# Allegro board RK3568_Template_DDR3P416DD6_44X41_1066MHz_V10_20210129GXL.brd
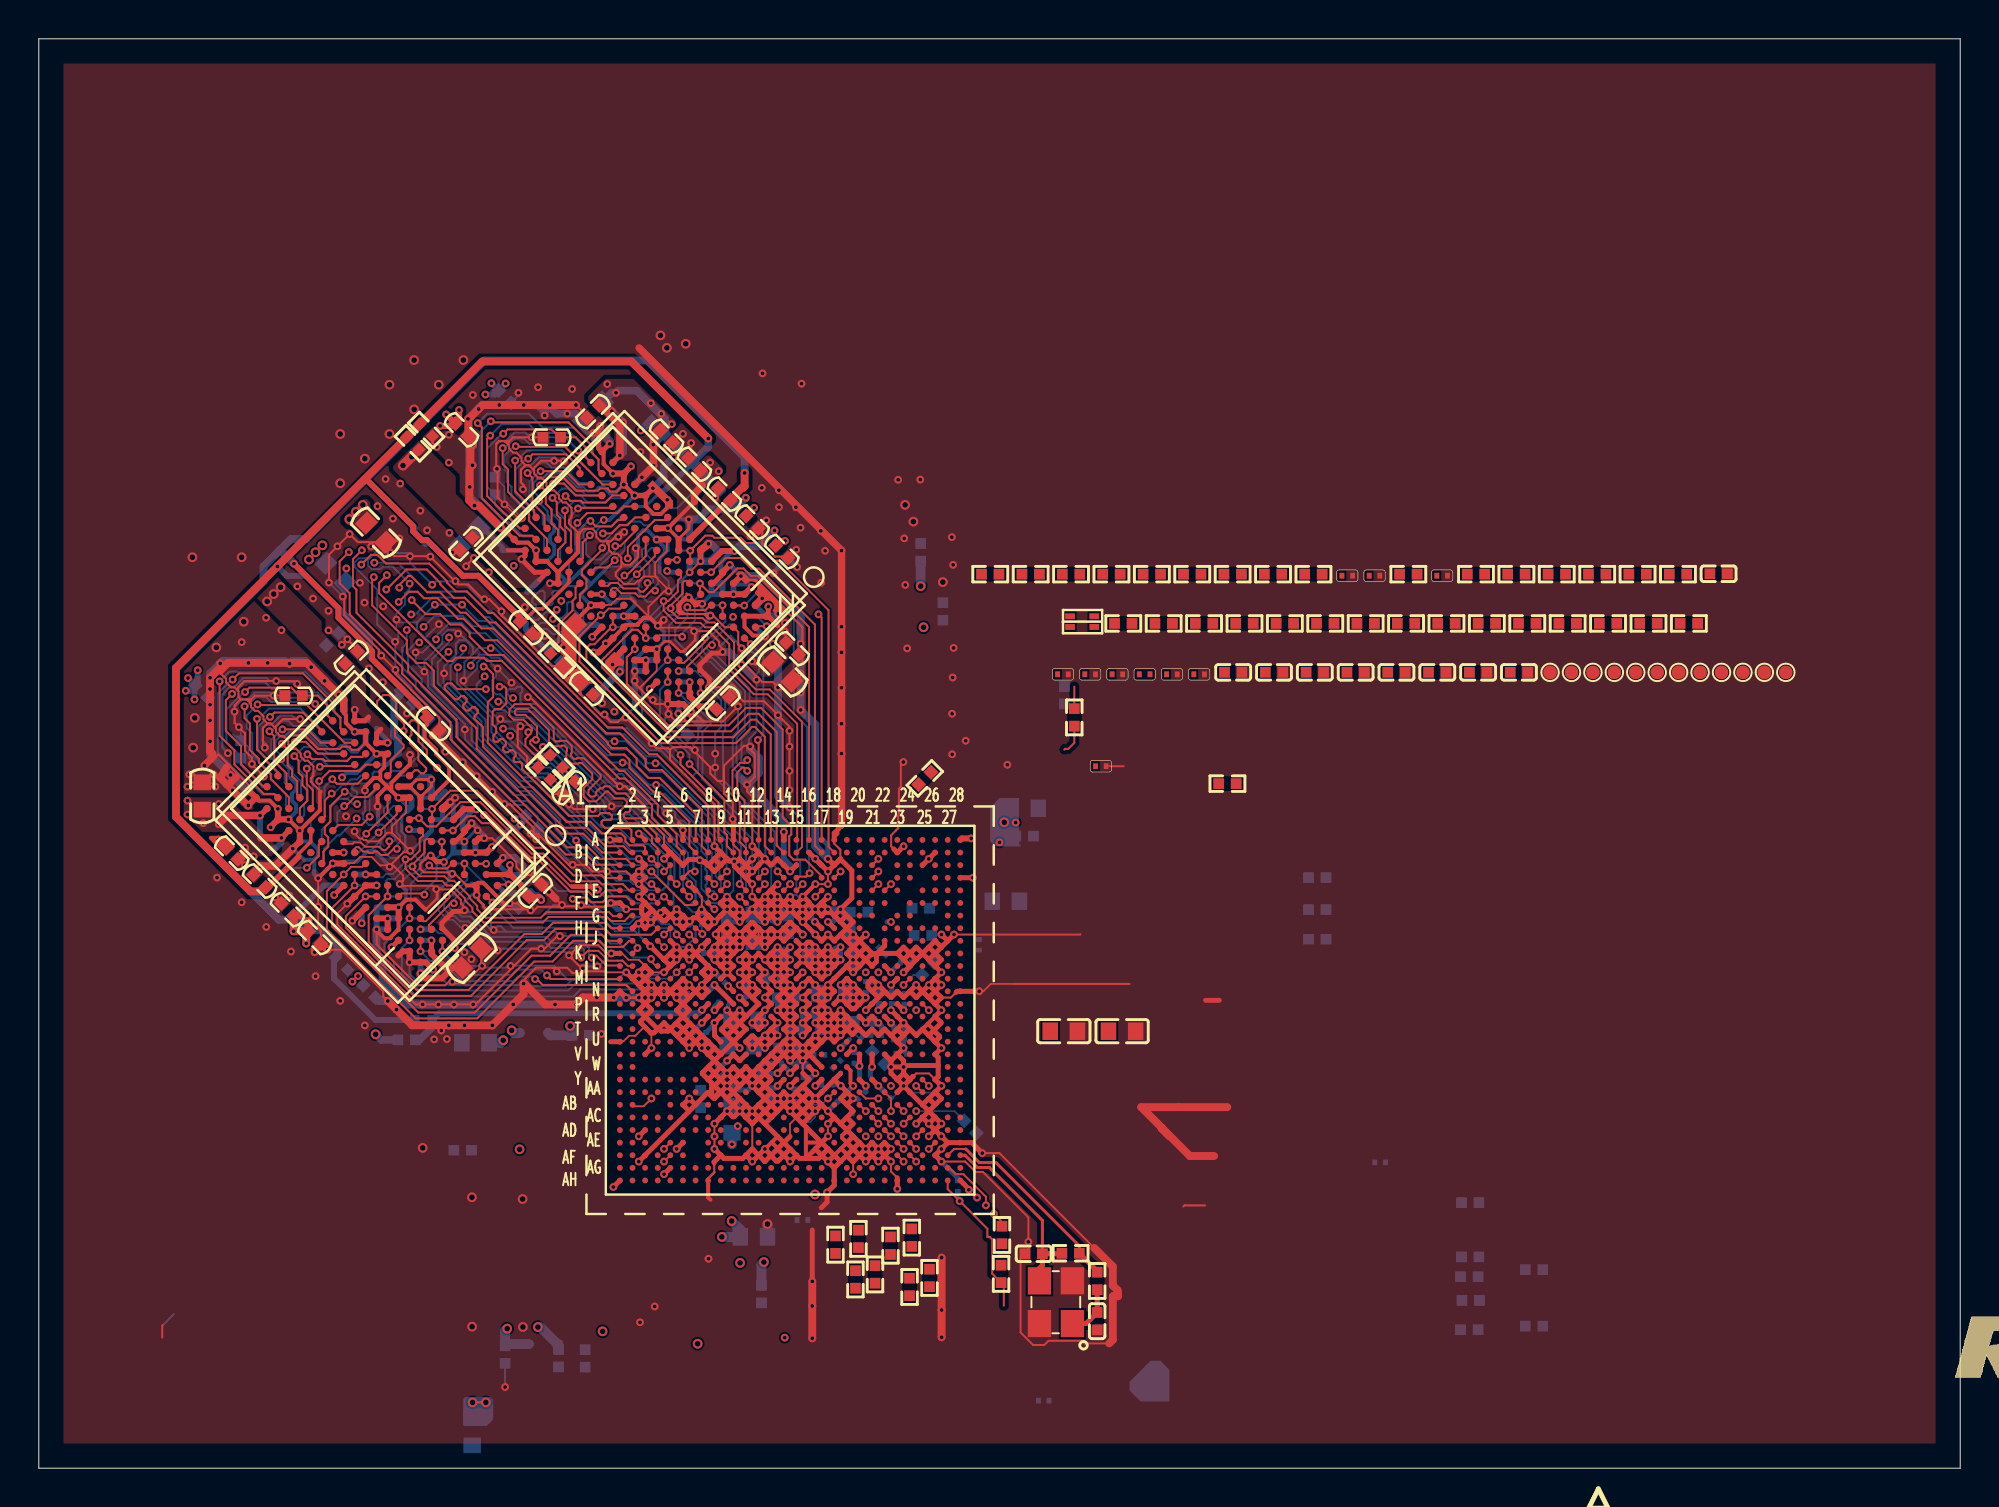
[diagram p0: board, top side]
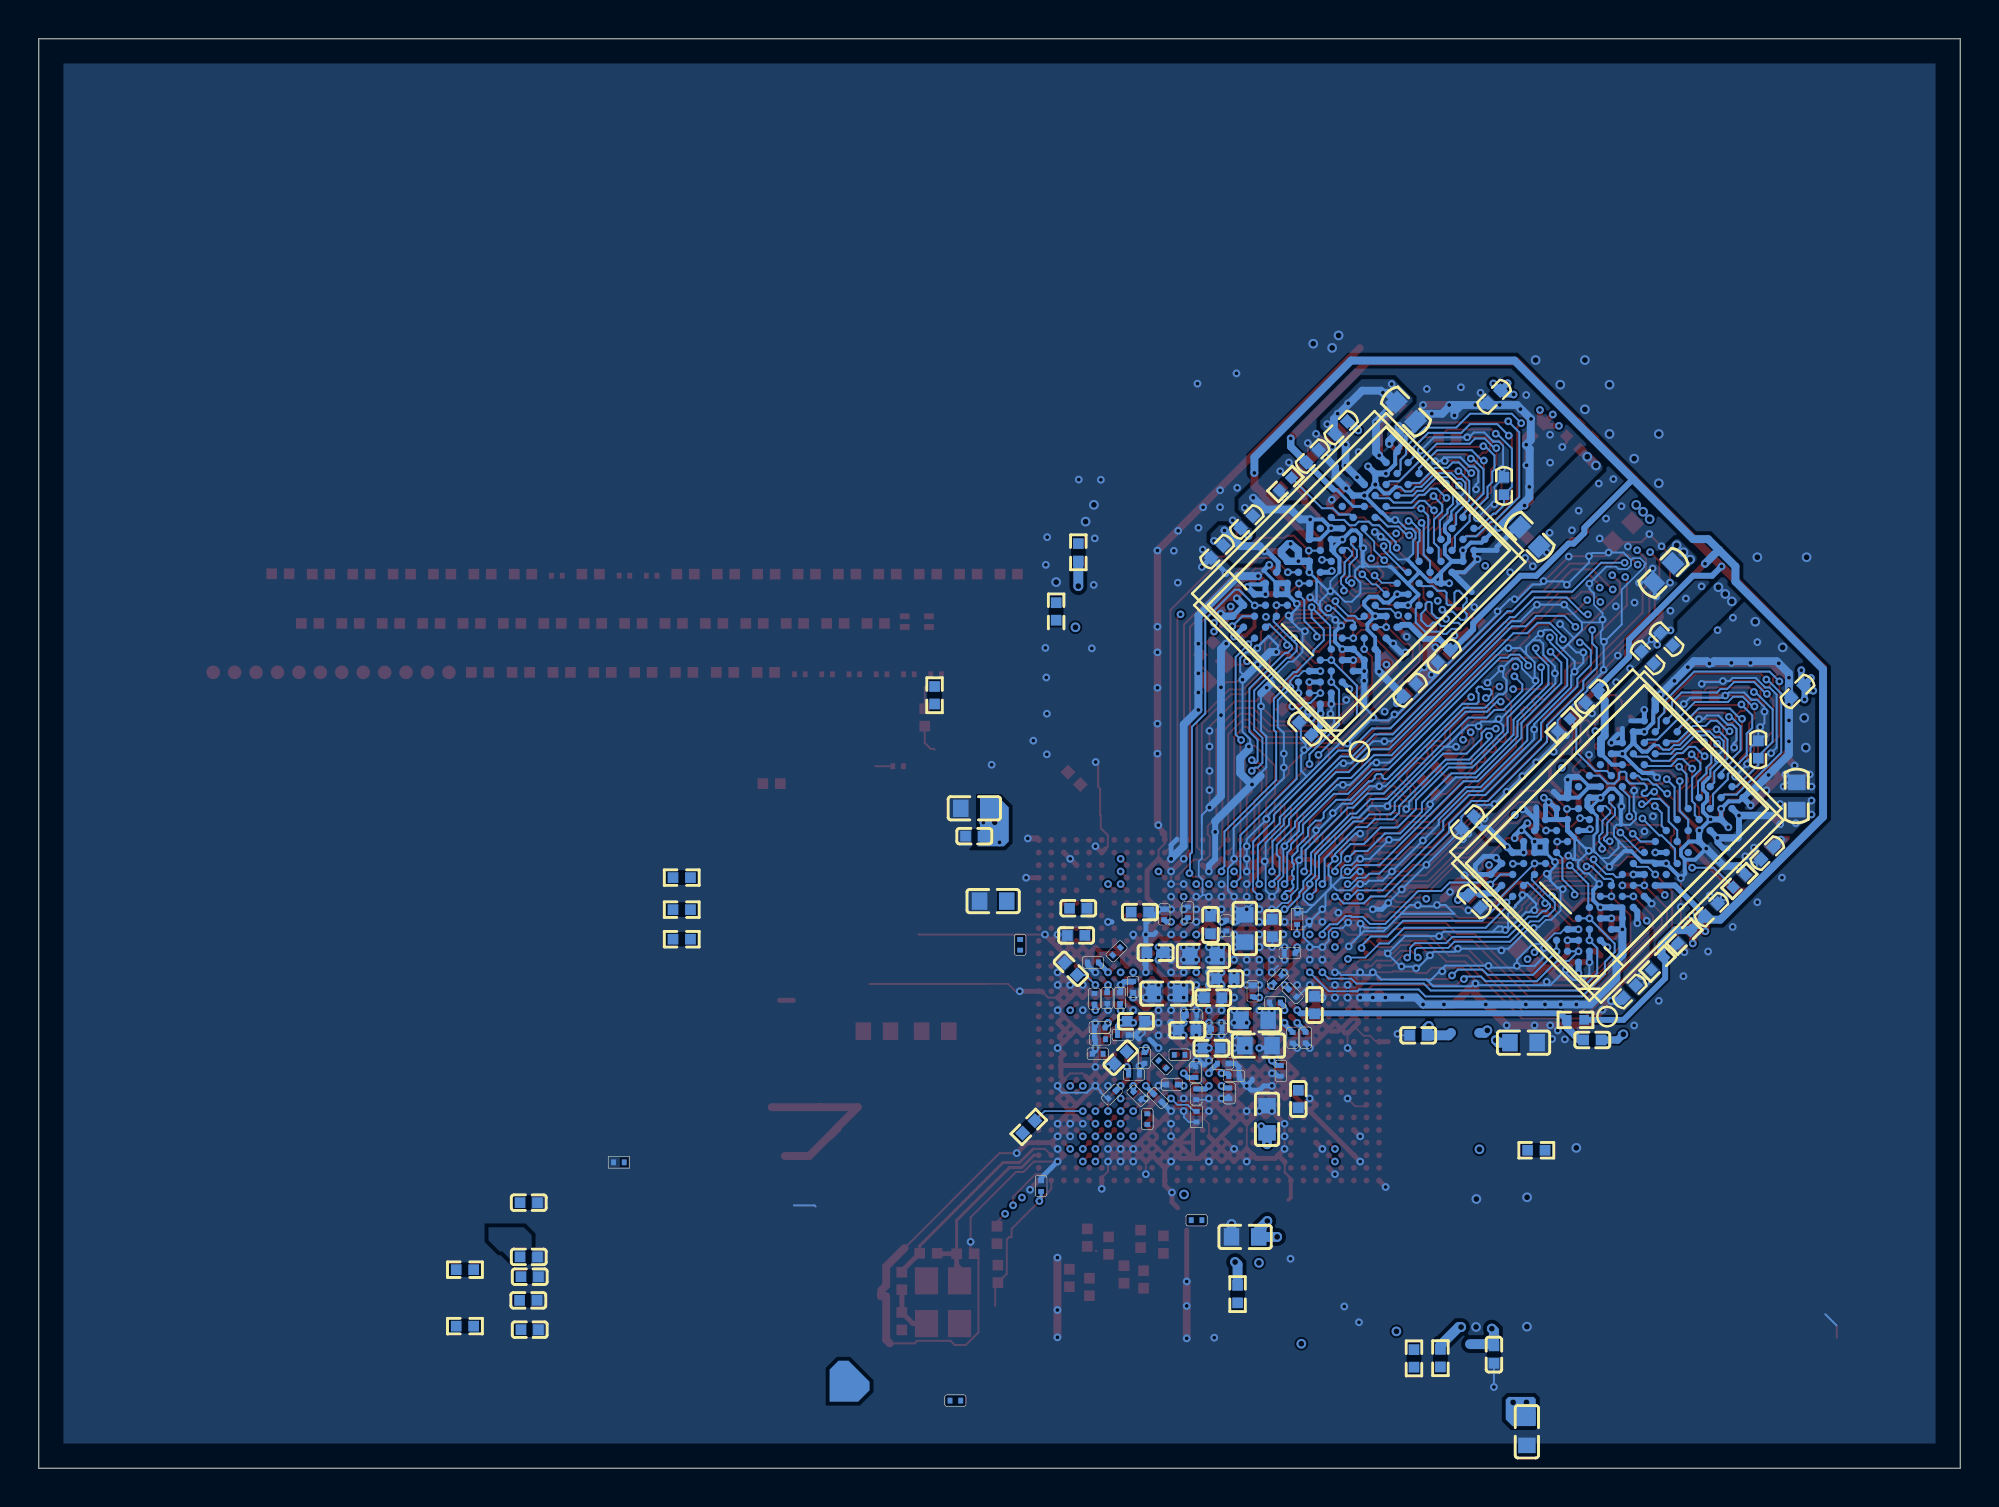
[diagram p1: board, bottom side, seen from below]

Outline 99.06 x 73.66 mm; copper layers: TOP, L2-GND1, L3-POWER, L4-S1, L5-GND2, BOTTOM. Coordinates in mm from the lower left corner of the outline.
Outline path: 0,73.66 99.06,73.66 99.06,0 0,0 0,73.66

## Design rules (mm)
net group DDR3_CLK: nets DDR3_CLKN DDR3_CLKP
net group EDP_TXD1N: nets EDP_TX_D1N EDP_TXD1N
net group EDP_TXD2N: nets EDP_TX_D2N EDP_TXD2N
net group EDP_TXD3P: nets EDP_TX_D3P EDP_TXD3P
net group EMMC_CLKOUT/FLASH_DQS: nets EMMC_CLKOUT/FLASH_DQS EMMC_CLKOUT/FLASH_DQS_SOC
net group FSPI_CLK/FLASH_ALE: nets FSPI_CLK/FLASH_ALE FSPI_CLK/FLASH_ALE_SOC
net group GMAC1_TXD2_M1: nets GMAC1_TXD2_M1 GMAC1_TXD2_M1_SOC
net group HDMI_TX0N: nets HDMI_TX0N HDMI_TX0N_PORT
net group HDMI_TX0P: nets HDMI_TX0P HDMI_TX0P_PORT
net group HDMI_TX1N: nets HDMI_TX1N HDMI_TX1N_PORT
net group HDMI_TX1P: nets HDMI_TX1P HDMI_TX1P_PORT
net group HDMI_TX2N: nets HDMI_TX2N HDMI_TX2N_PORT
net group HDMI_TX2P: nets HDMI_TX2P HDMI_TX2P_PORT
net group HDMI_TXCLKN: nets HDMI_TXCLKN HDMI_TXCLKN_PORT
net group HDMI_TXCLKP: nets HDMI_TXCLKP HDMI_TXCLKP_PORT
net group PCIE30_REFCLK_IN: nets PCIE30_REFCLKN_IN PCIE30_REFCLKP_IN
net group PCIE30_RX0: nets PCIE30_RX0N PCIE30_RX0P
net group PCIE30_RX1: nets PCIE30_RX1N PCIE30_RX1P
net group PCIE30_TX0: nets PCIE30_TX0N PCIE30_TX0P
net group PCIE30_TX1: nets PCIE30_TX1N PCIE30_TX1P
net group SATA1_RX: nets SATA1_RXN SATA1_RXP
net group SATA1_TX: nets SATA1_TXN SATA1_TXP
net group SATA2RX: nets SATA0_RXN SATA0_RXP
net group SATA2TX: nets SATA0_TXN SATA0_TXP
net group SDMMC0_D2/ARMJTAG_TCK: nets N17520091 SDMMC0_D2/ARMJTAG_TCK
net group SDMMC0_D3/ARMJTAG_TMS: nets N17520047 SDMMC0_D3/ARMJTAG_TMS
net group USB3_HOST1D: nets USB3_HOST1_DM USB3_HOST1_DP
net group USB3_OTG0D: nets USB3_OTG0_DM USB3_OTG0_DP

## Placement (name value [footprint] x y rotation side)
C1000  100nF  [C0402]  41.48 26.56 0 bottom
C1001  4.7uF  [C0402]  50.83 32.57 0 bottom
C1002  22uF  [C0603]  39.02 26.4 180 bottom
C1003  22uF  [C0603]  49.86 29.22 0 bottom
C1004  22uF  [C0603]  50.83 34.01 0 bottom
C1005  100nF  [C0201]  39.63 23.33 0 bottom
C1006  4.7uF  [C0402]  39.85 22.57 0 bottom
C1007  1uF  [C0402]  38.51 24.25 180 bottom
C1008  1uF  [C0402]  37.88 25.23 0 bottom
C1009  22uF  [C0603]  36.38 23.09 180 bottom
C1010  22uF  [C0603]  22.34 1.88 270 bottom
C1011  10uF  [C0603]  22.51 21.93 180 bottom
C1012  100nF  [C0201]  38.33 22.64 0 bottom
C1013  4.7uF  [C0402]  38.6 21.65 0 bottom
C1014  22uF  [C0603]  36.18 21.78 180 bottom
C1015  22uF  [C0603]  36.87 11.92 0 bottom
C1016  10uF  [C0603]  35.74 17.98 90 bottom
C1017  100nF  [C0201]  42.64 24.8 90 bottom
C1018  22uF  [C0603]  40.9 24.46 180 bottom
C1019  22uF  [C0603]  55.85 22.52 0 top
C1020  10uF  [C0603]  52.85 22.52 0 top
C1100  100nF  [C0201]  37.84 27.96 90 bottom
C1101  100nF  [C0201]  34.57 26.55 180 bottom
C1102  4.7uF  [C0402]  35.46 27.84 90 bottom
C1103  4.7uF  [C0402]  38.65 28 90 bottom
C1104  10uF  [C0603]  36.88 27.81 90 bottom
C1200  100nF  [C0201]  47.38 14.54 90 bottom
C1201  18pF  [C0402]  54.57 7.58 270 top
C1202  18pF  [C0402]  51.29 11.05 180 top
C1203  100nF  [C0201]  42.42 19.2 225 bottom
C1204  1uF  [C0402]  73.75 9.87 180 bottom
C1205  100nF  [C0201]  42.6 20.28 180 bottom
C1206  1uF  [C0402]  73.75 7.14 180 bottom
C1207  100nF  [C0201]  43.73 19.26 315 bottom
C1208  1uF  [C0402]  24.04 5.85 270 bottom
C1209  100nF  [C0201]  36.47 24.57 90 bottom
C1210  100nF  [C0201]  41.37 19.08 225 bottom
C1211  1uF  [C0402]  27.94 22.31 0 bottom
C1212  100nF  [C0201]  35.19 25.2 135 bottom
C1213  100nF  [C0201]  42.06 21.14 270 bottom
C1214  1uF  [C0402]  73.82 8.65 180 bottom
C1300  100nF  [C0201]  41.04 28.54 90 bottom
C1301  100nF  [C0201]  44.71 26.07 0 bottom
C1400  100nF  [C0402]  45.85 25.74 45 bottom
C1401  100nF  [C0201]  43.97 24.23 270 bottom
C1402  100nF  [C0201]  44.63 24.19 90 bottom
C1403  100nF  [C0201]  43.32 24.23 90 bottom
C1404  100nF  [C0201]  34.42 24.48 225 bottom
C1405  100nF  [C0201]  35.33 24 0 bottom
C1406  100nF  [C0201]  33.75 22.19 270 bottom
C1407  100nF  [C0201]  44.36 22.71 0 bottom
C1408  100nF  [C0201]  43.18 22.32 180 bottom
C1409  4.7uF  [C0402]  42.5 23.03 180 bottom
C1410  4.7uF  [C0402]  73.8 13.68 180 bottom
C1411  100nF  [C0201]  44.46 21.36 0 bottom
C1412  100nF  [C0201]  44.34 22.1 0 bottom
C1413  4.7uF  [C0402]  43.29 21.15 315 bottom
C1414  4.7uF  [C0402]  73.8 10.89 180 bottom
C1500  100nF  [C0201]  54.76 36.17 0 top
C1501  1nF  [C0402]  45.47 28.86 180 bottom
C1502  1nF  [C0402]  42.29 28.66 180 bottom
C1503  1nF  [C0402]  45.58 27.45 0 bottom
C1504  1nF  [C0402]  34.12 19.03 270 bottom
C1505  1nF  [C0402]  61.58 41.01 0 top
C1506  1nF  [C0402]  70 41.01 0 top
C1507  1nF  [C0402]  72.1 41.01 0 top
C1508  1nF  [C0402]  63.68 41.01 0 top
C1509  100nF  [C0201]  52.8 40.91 0 top
C1510  100nF  [C0201]  54.2 40.91 0 top
C1511  100nF  [C0201]  55.61 40.91 0 top
C1600  100nF  [C0201]  37.68 19.32 270 bottom
C1601  100nF  [C0201]  37.43 20.21 180 bottom
C1602  100nF  [C0201]  34.42 22.18 270 bottom
C1603  1uF  [C0402]  76.31 41.01 0 top
C1700  100nF  [C0201]  40.64 19.77 0 bottom
C1701  100nF  [C0201]  39.42 20.41 90 bottom
C1702  100nF  [C0201]  39.39 19.27 270 bottom
C1703  100nF  [C0201]  38.02 20.85 180 bottom
C1704  100nF  [C0201]  41.91 17.99 270 bottom
C1705  100nF  [C0201]  43.49 26.63 135 bottom
C1706  100nF  [C0201]  48.46 26.97 90 bottom
C1707  100nF  [C0201]  41.13 20.81 45 bottom
C1708  100nF  [C0201]  40.25 21.3 180 bottom
C1709  100nF  [C0201]  51.81 3.48 0 bottom
C1710  100nF  [C0201]  39.37 12.78 0 bottom
C1711  100nF  [C0201]  57.01 40.91 0 top
C1712  100nF  [C0201]  58.42 40.91 0 top
C1713  100nF  [C0201]  59.82 40.91 0 top
C1714  100nF  [C0201]  68.86 45.99 0 top
C1715  1uF  [C0402]  74.21 41.01 0 top
C1716  1uF  [C0402]  67.89 41.01 0 top
C1717  100nF  [C0201]  67.46 45.99 0 top
C1718  100nF  [C0201]  72.35 45.99 0 top
C1719  4.7uF  [C0402]  65.79 41.01 0 top
C1720  4.7uF  [C0402]  86.6 46.09 0 top
C1800  100nF  [C0201]  35.02 20.48 270 bottom
C1900  100nF  [C0201]  39.82 28.65 90 bottom
C3100  1nF  [C0402]  26.44 53.12 180 top
C3101  1nF  [C0402]  10.41 37.04 90 bottom
C3102  1nF  [C0402]  23.52 50.62 90 bottom
C3103  1nF  [C0402]  13.14 39.82 180 top
C3104  100pF  [C0402]  27.34 35.06 225 top
C3105  1nF  [C0402]  11.38 30.26 135 top
C3106  1nF  [C0402]  18.99 39.76 315 bottom
C3107  1nF  [C0402]  25.13 43.32 315 top
C3108  1nF  [C0402]  33.39 52.15 135 bottom
C3109  10uF  [C0603]  22.31 26.29 45 top
C3110  10uF  [C0603]  22.2 48 225 bottom
C3111  100nF  [C0402]  33.8 51.74 135 top
C3112  100nF  [C0402]  38.31 47.23 315 top
C3113  100nF  [C0402]  32.36 53.18 315 top
C3114  100nF  [C0402]  25.4 33.28 315 bottom
C3115  100nF  [C0402]  15.14 42.72 45 bottom
C3116  100nF  [C0402]  24.03 55.22 315 bottom
C3117  100nF  [C0402]  36.78 48.76 315 top
C3118  10uF  [C0603]  8.43 34.64 90 bottom
C3119  10uF  [C0603]  38.34 41.05 315 top
C3120  100nF  [C0402]  17.04 24.56 315 bottom
C3121  100nF  [C0402]  28.37 40.1 135 bottom
C3122  100nF  [C0402]  16.12 41.78 45 bottom
C3123  100nF  [C0402]  33.77 38.1 45 bottom
C3124  100nF  [C0402]  22.02 47.64 225 top
C3125  100nF  [C0402]  31.92 53.62 135 bottom
C3126  100nF  [C0402]  28.57 54.45 225 top
C3127  1nF  [C0402]  12.82 28.78 135 bottom
C3128  1nF  [C0402]  26.61 41.85 315 bottom
C3129  1nF  [C0402]  20.33 38.36 315 top
C3130  1nF  [C0402]  35.34 50.19 135 top
C3131  10uF  [C0603]  15.3 46.13 315 bottom
C3132  10uF  [C0603]  8.43 34.64 90 top
C3133  100nF  [C0402]  35.27 39.41 45 top
C3134  100nF  [C0402]  25.6 29.76 45 top
C3135  100nF  [C0402]  16.12 41.78 45 top
C3136  100nF  [C0402]  9.95 31.69 135 bottom
C3137  100nF  [C0402]  38.85 42.24 315 top
C3138  100nF  [C0402]  25.06 29.21 225 bottom
C3139  100nF  [C0402]  9.95 31.69 135 top
C3140  10uF  [C0603]  28.57 54.45 225 bottom
C3141  10uF  [C0603]  17.38 48.22 315 top
C3142  100nF  [C0402]  38.31 47.23 315 bottom
C3143  100nF  [C0402]  36.78 48.76 315 bottom
C3144  100nF  [C0402]  14.22 27.35 315 top
C3145  100nF  [C0402]  21.79 53.51 315 top
C3146  100nF  [C0402]  12.82 28.79 135 top
C3147  100nF  [C0402]  28.24 40.17 135 top
C3148  100nF  [C0402]  8.39 40.03 315 bottom
C3149  1nF  [C0402]  18.97 22.07 0 bottom
C3150  1nF  [C0402]  33.29 23.87 90 bottom
L1700  NC  [RP2_0405]  53.79 43.63 0 top
NOREF  -  []  108.2 3.43 0 top
R1100  120R  [R0201]  34.19 28.29 90 bottom
R1200  22R  [R0402#2]  54.57 9.65 90 top
R1201  0R  [R0402#2]  49.61 10.01 90 top
R1202  1M  [R0402#2]  53.2 11.08 180 top
R1203  22R  [R0402#2]  49.66 12.02 90 top
R1204  2.2K  [R0402#2]  48.02 17.59 315 bottom
R1205  2.2K  [R0402#2]  37.26 8.97 270 bottom
R1206  2.2K  [R0402#2]  77.09 10.23 180 bottom
R1207  2.2K  [R0402#2]  77.09 7.32 180 bottom
R1300  22R  [R0402#2]  61.28 35.28 0 top
R1301  22R  [R0402#2]  45.68 35.55 45 top
R1302  22R  [R0402#2]  46.61 44.15 90 bottom
R1303  22R  [R0402#2]  65.91 27.26 0 bottom
R1304  22R  [R0402#2]  55.91 43.53 0 top
R1400  200R  [R0201]  69.15 15.76 0 bottom
R1500  22R  [R0402#2]  52.88 39.83 90 bottom
R1501  22R  [R0402#2]  65.91 28.78 0 bottom
R1502  22R  [R0402#2]  65.91 30.43 0 bottom
R1503  22R  [R0402#2]  53.39 38.69 90 top
R1504  22R  [R0402#2]  28.16 5.66 270 bottom
R1505  22R  [R0402#2]  57.99 43.53 0 top
R1506  22R  [R0402#2]  60.08 43.53 0 top
R1507  22R  [R0402#2]  62.16 43.53 0 top
R1508  0R  [R0402#2]  80.34 46.07 0 top
R1509  0R  [R0402#2]  78.26 46.07 0 top
R1510  0R  [R0402#2]  76.18 46.07 0 top
R1511  0R  [R0402#2]  74.1 46.07 0 top
R1512  10K  [R0402#2]  84.51 46.07 0 top
R1600  22R  [R0402#2]  21.85 16.38 180 bottom
R1601  22R  [R0402#2]  64.24 43.53 0 top
R1602  22R  [R0402#2]  66.33 43.53 0 top
R1603  22R  [R0402#2]  68.41 43.53 0 top
R1604  22R  [R0402#2]  70.49 43.53 0 top
R1605  22R  [R0402#2]  72.57 43.53 0 top
R1606  2.2K  [R0402#2]  55.3 46.07 0 top
R1607  2.2K  [R0402#2]  57.38 46.07 0 top
R1608  22R  [R0402#2]  74.66 43.53 0 top
R1609  22R  [R0402#2]  76.74 43.53 0 top
R1610  0R  [R0402#2]  70.61 46.07 0 top
R1611  0R  [R0402#2]  65.72 46.07 0 top
R1700  2.2R  [R0402#2]  45.92 9.8 270 top
R1701  2.2R  [R0402#2]  44.89 9.34 270 top
R1702  2.2R  [R0402#2]  45.01 11.88 270 top
R1703  2.2R  [R0402#2]  43.91 11.47 270 top
R1704  2.2R  [R0402#2]  43.11 9.98 270 top
R1705  2.2R  [R0402#2]  42.1 9.73 270 top
R1706  2.2R  [R0402#2]  42.26 11.82 270 top
R1707  2.2R  [R0402#2]  41.08 11.52 270 top
R1708  1.62K  [R0201]  39.37 18.12 270 bottom
R1800  10K  [R0402#2]  26.8 5.67 270 bottom
R1801  10K  [R0402#2]  82.43 46.07 0 top
R1802  22R  [R0402#2]  78.82 43.53 0 top
R1803  22R  [R0402#2]  80.91 43.53 0 top
R1804  2.2K  [R0402#2]  59.47 46.07 0 top
R1805  2.2K  [R0402#2]  61.55 46.07 0 top
R1900  2.2K  [R0402#2]  45.47 47.2 90 bottom
R1901  2.2K  [R0402#2]  63.63 46.07 0 top
R1902  22R  [R0402#2]  82.99 43.53 0 top
R1903  22R  [R0402#2]  85.07 43.53 0 top
R1904  22R  [R0402#2]  49.05 46.07 0 top
R1905  22R  [R0402#2]  51.14 46.07 0 top
R1906  22R  [R0402#2]  53.22 46.07 0 top
R3100  240R  [R0402]  11.38 30.26 135 bottom
R3101  240R  [R0402]  26.7 41.66 315 top
R3102  240R  [R0402]  20.44 38.29 315 bottom
R3103  240R  [R0402]  34.79 50.72 315 bottom
R3104  1K  [R0402]  19.28 52.82 135 top
R3105  49.9R  [R0402]  26.69 36.43 315 top
R3106  1K  [R0402]  19.97 53.5 315 top
R3107  49.9R  [R0402]  26.06 35.8 315 top
R3108  1K  [R0402]  15.61 26 135 bottom
R3109  0R  [R0402]  19.84 23.1 180 bottom
R3110  1K  [R0402]  14.22 27.38 315 bottom
TP1300  TP_0.7  [TP_0R70]  85.65 41.01 0 top
TP1301  TP_0.7  [TP_0R70]  88.96 41.01 0 top
TP1302  TP_0.7  [TP_0R70]  79.02 41.01 0 top
TP1303  TP_0.7  [TP_0R70]  77.91 41.01 0 top
TP1304  TP_0.7  [TP_0R70]  80.12 41.01 0 top
TP1305  TP_0.7  [TP_0R70]  87.86 41.01 0 top
TP1500  TP_0.7  [TP_0R70]  86.75 41.01 0 top
TP1501  TP_0.7  [TP_0R70]  90.07 41.01 0 top
TP1502  TP_0.7  [TP_0R70]  84.54 41.01 0 top
TP1600  TP_0.7  [TP_0R70]  83.44 41.01 0 top
TP1800  TP_0.7  [TP_0R70]  82.33 41.01 0 top
TP1801  TP_0.7  [TP_0R70]  81.23 41.01 0 top
U1000  RK3568  [BGA636_19R00X19R00X1R20]  38.73 23.6 0 top
U3100  DDR3X16bit  [FBGA96_14R00X11R00X1R20]  17.7 32.58 225 top
U3101  DDR3X16bit  [FBGA96_14R00X11R00X1R20]  31.01 45.89 225 top
U3102  DDR3X16bit  [FBGA96_14R00X11R00X1R20]  17.7 32.58 45 bottom
U3103  DDR3X16bit  [FBGA96_14R00X11R00X1R20]  31.01 45.89 45 bottom
Y1200  24MHz  [CRY4_3R20X2R50X0R80]  52.44 8.55 90 top

## Library data of the parts
C1000-C1020 C1100-C1104 C1200-C1214 C1300 C1301 C1400-C1414 C1500-C1511 C1600-C1603 C1700-C1707 C1711-C1720 C1800 C1900 C3100-C3150 = CAP NP
C1708-C1710 = CAP NP: signal model: CAP_NP_C0201_100NF_100nF
L1700 = INDUCTOR COM
R1100 R1200-R1207 R1304 R1400 R1500-R1512 R1601-R1611 R1800-R1805 R1900-R1906 R3100-R3110 = RESISTOR
R1300 R1302 R1303 R1600 = RESISTOR: signal model: RESISTOR_R0402_0R_0R
R1301 = RESISTOR: signal model: RESISTOR_R0402_22R_22R
R1700-R1703 = RESISTOR: signal model: RESISTOR_R0201_2.2R_2.2R
R1704-R1708 = RESISTOR: signal model: RESISTOR_R0402_2.2R_2.2R
TP1300-TP1305 TP1500-TP1502 TP1600 TP1800 TP1801 = TP
U1000 = SOC_RK3568
U3100-U3103 = DRAM-DDR3_1x16bit_1
Y1200 = CRYSTAL_4P

## Footprints (pads in the part's own frame, mm; a bottom-side part is the same pattern mirrored in y, then rotated)
BGA636_19R00X19R00X1R20
  round 0.3 smd: A1(-8.775,8.775) A2(-8.125,8.775) A3(-7.475,8.775) A4(-6.825,8.775) A5(-6.175,8.775) A6(-5.525,8.775) A7(-4.875,8.775) A8(-4.225,8.775) A9(-3.575,8.775) A10(-2.925,8.775) A11(-2.275,8.775) A12(-1.625,8.775) A13(-0.975,8.775) A14(-0.325,8.775) A15(0.325,8.775) A16(0.975,8.775) A17(1.625,8.775) A18(2.275,8.775) A19(2.925,8.775) A20(3.575,8.775) A21(4.225,8.775) A22(4.875,8.775) A23(5.525,8.775) A24(6.175,8.775) A25(6.825,8.775) A26(7.475,8.775) A27(8.125,8.775) A28(8.775,8.775) AA1(-8.775,-4.225) AA2(-8.125,-4.225) AA3(-7.475,-4.225) AA4(-6.825,-4.225) AA5(-6.175,-4.225) AA6(-5.525,-4.225) AA7(-4.875,-4.225) AA9(-3.575,-4.225) AA11(-2.275,-4.225) AA12(-1.625,-4.225) AA14(-0.325,-4.225) AA15(0.325,-4.225) AA17(1.625,-4.225) AA18(2.275,-4.225) AA20(3.575,-4.225) AA22(4.875,-4.225) AA23(5.525,-4.225) AA24(6.175,-4.225) AA25(6.825,-4.225) AA26(7.475,-4.225) AA27(8.125,-4.225) AA28(8.775,-4.225) AB1(-8.775,-4.875) AB2(-8.125,-4.875) AB5(-6.175,-4.875) AB6(-5.525,-4.875) AB8(-4.225,-4.875) AB9(-3.575,-4.875) AB11(-2.275,-4.875) AB12(-1.625,-4.875) AB14(-0.325,-4.875) AB15(0.325,-4.875) AB17(1.625,-4.875) AB18(2.275,-4.875) AB20(3.575,-4.875) AB21(4.225,-4.875) AB23(5.525,-4.875) AB24(6.175,-4.875) AB27(8.125,-4.875) AB28(8.775,-4.875) AC1(-8.775,-5.525) AC2(-8.125,-5.525) AC3(-7.475,-5.525) AC4(-6.825,-5.525) AC5(-6.175,-5.525) AC7(-4.875,-5.525) AC8(-4.225,-5.525) AC9(-3.575,-5.525) AC11(-2.275,-5.525) AC12(-1.625,-5.525) AC14(-0.325,-5.525) AC15(0.325,-5.525) AC17(1.625,-5.525) AC18(2.275,-5.525) AC20(3.575,-5.525) AC21(4.225,-5.525) AC22(4.875,-5.525) AC24(6.175,-5.525) AC25(6.825,-5.525) AC26(7.475,-5.525) AC27(8.125,-5.525) AC28(8.775,-5.525) AD1(-8.775,-6.175) AD2(-8.125,-6.175) AD3(-7.475,-6.175) AD4(-6.825,-6.175) AD6(-5.525,-6.175) AD7(-4.875,-6.175) AD8(-4.225,-6.175) AD9(-3.575,-6.175) AD11(-2.275,-6.175) AD12(-1.625,-6.175) AD14(-0.325,-6.175) AD15(0.325,-6.175) AD17(1.625,-6.175) AD18(2.275,-6.175) AD20(3.575,-6.175) AD21(4.225,-6.175) AD22(4.875,-6.175) AD23(5.525,-6.175) AD25(6.825,-6.175) AD26(7.475,-6.175) AD27(8.125,-6.175) AD28(8.775,-6.175) AE1(-8.775,-6.825) AE2(-8.125,-6.825) AE3(-7.475,-6.825) AE5(-6.175,-6.825) AE6(-5.525,-6.825) AE8(-4.225,-6.825) AE9(-3.575,-6.825) AE11(-2.275,-6.825) AE12(-1.625,-6.825) AE14(-0.325,-6.825) AE15(0.325,-6.825) AE17(1.625,-6.825) AE18(2.275,-6.825) AE20(3.575,-6.825) AE21(4.225,-6.825) AE23(5.525,-6.825) AE24(6.175,-6.825) AE26(7.475,-6.825) AE27(8.125,-6.825) AE28(8.775,-6.825) AF1(-8.775,-7.475) AF2(-8.125,-7.475) AF3(-7.475,-7.475) AF4(-6.825,-7.475) AF5(-6.175,-7.475) AF6(-5.525,-7.475) AF8(-4.225,-7.475) AF9(-3.575,-7.475) AF11(-2.275,-7.475) AF12(-1.625,-7.475) AF14(-0.325,-7.475) AF15(0.325,-7.475) AF17(1.625,-7.475) AF18(2.275,-7.475) AF20(3.575,-7.475) AF21(4.225,-7.475) AF23(5.525,-7.475) AF24(6.175,-7.475) AF25(6.825,-7.475) AF26(7.475,-7.475) AF27(8.125,-7.475) AF28(8.775,-7.475) AG1(-8.775,-8.125) AG2(-8.125,-8.125) AG3(-7.475,-8.125) AG4(-6.825,-8.125) AG5(-6.175,-8.125) AG6(-5.525,-8.125) AG7(-4.875,-8.125) AG8(-4.225,-8.125) AG9(-3.575,-8.125) AG10(-2.925,-8.125) AG11(-2.275,-8.125) AG12(-1.625,-8.125) AG13(-0.975,-8.125) AG14(-0.325,-8.125) AG15(0.325,-8.125) AG16(0.975,-8.125) AG17(1.625,-8.125) AG18(2.275,-8.125) AG19(2.925,-8.125) AG20(3.575,-8.125) AG21(4.225,-8.125) AG22(4.875,-8.125) AG23(5.525,-8.125) AG24(6.175,-8.125) AG25(6.825,-8.125) AG26(7.475,-8.125) AG27(8.125,-8.125) AG28(8.775,-8.125) AH1(-8.775,-8.775) AH2(-8.125,-8.775) AH3(-7.475,-8.775) AH4(-6.825,-8.775) AH5(-6.175,-8.775) AH6(-5.525,-8.775) AH7(-4.875,-8.775) AH8(-4.225,-8.775) AH9(-3.575,-8.775) AH10(-2.925,-8.775) AH11(-2.275,-8.775) AH12(-1.625,-8.775) AH13(-0.975,-8.775) AH14(-0.325,-8.775) AH15(0.325,-8.775) AH16(0.975,-8.775) AH17(1.625,-8.775) AH18(2.275,-8.775) AH19(2.925,-8.775) AH20(3.575,-8.775) AH21(4.225,-8.775) AH22(4.875,-8.775) AH23(5.525,-8.775) AH24(6.175,-8.775) AH25(6.825,-8.775) AH26(7.475,-8.775) AH27(8.125,-8.775) AH28(8.775,-8.775) B1(-8.775,8.125) B2(-8.125,8.125) B3(-7.475,8.125) B4(-6.825,8.125) B5(-6.175,8.125) B6(-5.525,8.125) B7(-4.875,8.125) B8(-4.225,8.125) B9(-3.575,8.125) B10(-2.925,8.125) B11(-2.275,8.125) B12(-1.625,8.125) B13(-0.975,8.125) B14(-0.325,8.125) B15(0.325,8.125) B16(0.975,8.125) B17(1.625,8.125) B18(2.275,8.125) B19(2.925,8.125) B20(3.575,8.125) B21(4.225,8.125) B22(4.875,8.125) B23(5.525,8.125) B24(6.175,8.125) B25(6.825,8.125) B26(7.475,8.125) B27(8.125,8.125) B28(8.775,8.125) C1(-8.775,7.475) C2(-8.125,7.475) C3(-7.475,7.475) C4(-6.825,7.475) C5(-6.175,7.475) C6(-5.525,7.475) C8(-4.225,7.475) C9(-3.575,7.475) C11(-2.275,7.475) C12(-1.625,7.475) C14(-0.325,7.475) C15(0.325,7.475) C17(1.625,7.475) C18(2.275,7.475) C20(3.575,7.475) C21(4.225,7.475) C23(5.525,7.475) C24(6.175,7.475) C25(6.825,7.475) C26(7.475,7.475) C27(8.125,7.475) C28(8.775,7.475) D1(-8.775,6.825) D2(-8.125,6.825) D3(-7.475,6.825) D5(-6.175,6.825) D6(-5.525,6.825) D8(-4.225,6.825) D9(-3.575,6.825) D11(-2.275,6.825) D12(-1.625,6.825) D14(-0.325,6.825) D15(0.325,6.825) D17(1.625,6.825) D18(2.275,6.825) D20(3.575,6.825) D21(4.225,6.825) D23(5.525,6.825) D24(6.175,6.825) D26(7.475,6.825) D27(8.125,6.825) D28(8.775,6.825) E1(-8.775,6.175) E2(-8.125,6.175) E3(-7.475,6.175) E4(-6.825,6.175) E6(-5.525,6.175) E7(-4.875,6.175) E8(-4.225,6.175) E9(-3.575,6.175) E11(-2.275,6.175) E12(-1.625,6.175) E14(-0.325,6.175) E15(0.325,6.175) E17(1.625,6.175) E18(2.275,6.175) E20(3.575,6.175) E21(4.225,6.175) E22(4.875,6.175) E23(5.525,6.175) E25(6.825,6.175) E26(7.475,6.175) E27(8.125,6.175) E28(8.775,6.175) F1(-8.775,5.525) F2(-8.125,5.525) F3(-7.475,5.525) F4(-6.825,5.525) F5(-6.175,5.525) F7(-4.875,5.525) F8(-4.225,5.525) F9(-3.575,5.525) F11(-2.275,5.525) F12(-1.625,5.525) F14(-0.325,5.525) F15(0.325,5.525) F17(1.625,5.525) F18(2.275,5.525) F20(3.575,5.525) F21(4.225,5.525) F22(4.875,5.525) F24(6.175,5.525) F25(6.825,5.525) F26(7.475,5.525) F27(8.125,5.525) F28(8.775,5.525) G1(-8.775,4.875) G2(-8.125,4.875) G5(-6.175,4.875) G6(-5.525,4.875) G8(-4.225,4.875) G9(-3.575,4.875) G11(-2.275,4.875) G12(-1.625,4.875) G14(-0.325,4.875) G15(0.325,4.875) G17(1.625,4.875) G18(2.275,4.875) G20(3.575,4.875) G21(4.225,4.875) G23(5.525,4.875) G24(6.175,4.875) G27(8.125,4.875) G28(8.775,4.875) H1(-8.775,4.225) H2(-8.125,4.225) H3(-7.475,4.225) H4(-6.825,4.225) H5(-6.175,4.225) H6(-5.525,4.225) H7(-4.875,4.225) H9(-3.575,4.225) H11(-2.275,4.225) H12(-1.625,4.225) H14(-0.325,4.225) H15(0.325,4.225) H17(1.625,4.225) H18(2.275,4.225) H20(3.575,4.225) H22(4.875,4.225) H23(5.525,4.225) H24(6.175,4.225) H25(6.825,4.225) H26(7.475,4.225) H27(8.125,4.225) H28(8.775,4.225) J1(-8.775,3.575) J2(-8.125,3.575) J3(-7.475,3.575) J4(-6.825,3.575) J5(-6.175,3.575) J6(-5.525,3.575) J7(-4.875,3.575) J8(-4.225,3.575) J9(-3.575,3.575) J11(-2.275,3.575) J12(-1.625,3.575) J14(-0.325,3.575) J15(0.325,3.575) J17(1.625,3.575) J18(2.275,3.575) J20(3.575,3.575) J21(4.225,3.575) J22(4.875,3.575) J23(5.525,3.575) J24(6.175,3.575) J25(6.825,3.575) J26(7.475,3.575) J27(8.125,3.575) J28(8.775,3.575) K1(-8.775,2.925) K2(-8.125,2.925) K10(-2.925,2.925) K11(-2.275,2.925) K12(-1.625,2.925) K13(-0.975,2.925) K14(-0.325,2.925) K15(0.325,2.925) K16(0.975,2.925) K17(1.625,2.925) K18(2.275,2.925) K19(2.925,2.925) K27(8.125,2.925) K28(8.775,2.925) L1(-8.775,2.275) L2(-8.125,2.275) L3(-7.475,2.275) L4(-6.825,2.275) L5(-6.175,2.275) L6(-5.525,2.275) L7(-4.875,2.275) L8(-4.225,2.275) L9(-3.575,2.275) L10(-2.925,2.275) L11(-2.275,2.275) L12(-1.625,2.275) L13(-0.975,2.275) L14(-0.325,2.275) L15(0.325,2.275) L16(0.975,2.275) L17(1.625,2.275) L18(2.275,2.275) L19(2.925,2.275) L20(3.575,2.275) L21(4.225,2.275) L22(4.875,2.275) L23(5.525,2.275) L24(6.175,2.275) L25(6.825,2.275) L26(7.475,2.275) L27(8.125,2.275) L28(8.775,2.275) M1(-8.775,1.625) M2(-8.125,1.625) M3(-7.475,1.625) M4(-6.825,1.625) M5(-6.175,1.625) M6(-5.525,1.625) M7(-4.875,1.625) M8(-4.225,1.625) M9(-3.575,1.625) M10(-2.925,1.625) M11(-2.275,1.625) M12(-1.625,1.625) M13(-0.975,1.625) M14(-0.325,1.625) M15(0.325,1.625) M16(0.975,1.625) M17(1.625,1.625) M18(2.275,1.625) M19(2.925,1.625) M20(3.575,1.625) M21(4.225,1.625) M22(4.875,1.625) M23(5.525,1.625) M24(6.175,1.625) M25(6.825,1.625) M26(7.475,1.625) M27(8.125,1.625) M28(8.775,1.625) N1(-8.775,0.975) N2(-8.125,0.975) N10(-2.925,0.975) N11(-2.275,0.975) N12(-1.625,0.975) N13(-0.975,0.975) N14(-0.325,0.975) N15(0.325,0.975) N16(0.975,0.975) N17(1.625,0.975) N18(2.275,0.975) N19(2.925,0.975) N27(8.125,0.975) N28(8.775,0.975) P1(-8.775,0.325) P2(-8.125,0.325) P3(-7.475,0.325) P4(-6.825,0.325) P5(-6.175,0.325) P6(-5.525,0.325) P7(-4.875,0.325) P8(-4.225,0.325) P9(-3.575,0.325) P10(-2.925,0.325) P11(-2.275,0.325) P12(-1.625,0.325) P13(-0.975,0.325) P14(-0.325,0.325) P15(0.325,0.325) P16(0.975,0.325) P17(1.625,0.325) P18(2.275,0.325) P19(2.925,0.325) P20(3.575,0.325) P21(4.225,0.325) P22(4.875,0.325) P23(5.525,0.325) P24(6.175,0.325) P25(6.825,0.325) P26(7.475,0.325) P27(8.125,0.325) P28(8.775,0.325) R1(-8.775,-0.325) R2(-8.125,-0.325) R3(-7.475,-0.325) R4(-6.825,-0.325) R5(-6.175,-0.325) R6(-5.525,-0.325) R7(-4.875,-0.325) R8(-4.225,-0.325) R9(-3.575,-0.325) R10(-2.925,-0.325) R11(-2.275,-0.325) R12(-1.625,-0.325) R13(-0.975,-0.325) R14(-0.325,-0.325) R15(0.325,-0.325) R16(0.975,-0.325) R17(1.625,-0.325) R18(2.275,-0.325) R19(2.925,-0.325) R20(3.575,-0.325) R21(4.225,-0.325) R22(4.875,-0.325) R23(5.525,-0.325) R24(6.175,-0.325) R25(6.825,-0.325) R26(7.475,-0.325) R27(8.125,-0.325) R28(8.775,-0.325) T1(-8.775,-0.975) T2(-8.125,-0.975) T10(-2.925,-0.975) T11(-2.275,-0.975) T12(-1.625,-0.975) T13(-0.975,-0.975) T14(-0.325,-0.975) T15(0.325,-0.975) T16(0.975,-0.975) T17(1.625,-0.975) T18(2.275,-0.975) T19(2.925,-0.975) T27(8.125,-0.975) T28(8.775,-0.975) U1(-8.775,-1.625) U2(-8.125,-1.625) U3(-7.475,-1.625) U4(-6.825,-1.625) U5(-6.175,-1.625) U6(-5.525,-1.625) U7(-4.875,-1.625) U8(-4.225,-1.625) U9(-3.575,-1.625) U10(-2.925,-1.625) U11(-2.275,-1.625) U12(-1.625,-1.625) U13(-0.975,-1.625) U14(-0.325,-1.625) U15(0.325,-1.625) U16(0.975,-1.625) U17(1.625,-1.625) U18(2.275,-1.625) U19(2.925,-1.625) U20(3.575,-1.625) U21(4.225,-1.625) U22(4.875,-1.625) U23(5.525,-1.625) U24(6.175,-1.625) U25(6.825,-1.625) U26(7.475,-1.625) U27(8.125,-1.625) U28(8.775,-1.625) V1(-8.775,-2.275) V2(-8.125,-2.275) V3(-7.475,-2.275) V4(-6.825,-2.275) V5(-6.175,-2.275) V6(-5.525,-2.275) V7(-4.875,-2.275) V8(-4.225,-2.275) V9(-3.575,-2.275) V10(-2.925,-2.275) V11(-2.275,-2.275) V12(-1.625,-2.275) V13(-0.975,-2.275) V14(-0.325,-2.275) V15(0.325,-2.275) V16(0.975,-2.275) V17(1.625,-2.275) V18(2.275,-2.275) V19(2.925,-2.275) V20(3.575,-2.275) V21(4.225,-2.275) V22(4.875,-2.275) V23(5.525,-2.275) V24(6.175,-2.275) V25(6.825,-2.275) V26(7.475,-2.275) V27(8.125,-2.275) V28(8.775,-2.275) W1(-8.775,-2.925) W2(-8.125,-2.925) W10(-2.925,-2.925) W11(-2.275,-2.925) W12(-1.625,-2.925) W13(-0.975,-2.925) W14(-0.325,-2.925) W15(0.325,-2.925) W16(0.975,-2.925) W17(1.625,-2.925) W18(2.275,-2.925) W19(2.925,-2.925) W27(8.125,-2.925) W28(8.775,-2.925) Y1(-8.775,-3.575) Y2(-8.125,-3.575) Y3(-7.475,-3.575) Y4(-6.825,-3.575) Y5(-6.175,-3.575) Y6(-5.525,-3.575) Y7(-4.875,-3.575) Y8(-4.225,-3.575) Y9(-3.575,-3.575) Y11(-2.275,-3.575) Y12(-1.625,-3.575) Y14(-0.325,-3.575) Y15(0.325,-3.575) Y17(1.625,-3.575) Y18(2.275,-3.575) Y20(3.575,-3.575) Y21(4.225,-3.575) Y22(4.875,-3.575) Y23(5.525,-3.575) Y24(6.175,-3.575) Y25(6.825,-3.575) Y26(7.475,-3.575) Y27(8.125,-3.575) Y28(8.775,-3.575)
C0201
  rect 0.25x0.3 smd: 1(-0.275,0) 2(0.275,0)
C0402
  rect 0.55x0.55 smd: 1(-0.45,0) 2(0.45,0)
C0603
  rect 0.8x0.9 smd: 1(-0.7,0) 2(0.7,0)
CRY4_3R20X2R50X0R80
  rect 1.4x1.2 smd: 1(-1.1,-0.85) 2(1.1,-0.85) 3(1.1,0.85) 4(-1.1,0.85)
FBGA96_14R00X11R00X1R20
  round 0.38 smd: A1(-3.2,6) A2(-2.4,6) A3(-1.6,6) A7(1.6,6) A8(2.4,6) A9(3.2,6) B1(-3.2,5.2) B2(-2.4,5.2) B3(-1.6,5.2) B7(1.6,5.2) B8(2.4,5.2) B9(3.2,5.2) C1(-3.2,4.4) C2(-2.4,4.4) C3(-1.6,4.4) C7(1.6,4.4) C8(2.4,4.4) C9(3.2,4.4) D1(-3.2,3.6) D2(-2.4,3.6) D3(-1.6,3.6) D7(1.6,3.6) D8(2.4,3.6) D9(3.2,3.6) E1(-3.2,2.8) E2(-2.4,2.8) E3(-1.6,2.8) E7(1.6,2.8) E8(2.4,2.8) E9(3.2,2.8) F1(-3.2,2) F2(-2.4,2) F3(-1.6,2) F7(1.6,2) F8(2.4,2) F9(3.2,2) G1(-3.2,1.2) G2(-2.4,1.2) G3(-1.6,1.2) G7(1.6,1.2) G8(2.4,1.2) G9(3.2,1.2) H1(-3.2,0.4) H2(-2.4,0.4) H3(-1.6,0.4) H7(1.6,0.4) H8(2.4,0.4) H9(3.2,0.4) J1(-3.2,-0.4) J2(-2.4,-0.4) J3(-1.6,-0.4) J7(1.6,-0.4) J8(2.4,-0.4) J9(3.2,-0.4) K1(-3.2,-1.2) K2(-2.4,-1.2) K3(-1.6,-1.2) K7(1.6,-1.2) K8(2.4,-1.2) K9(3.2,-1.2) L1(-3.2,-2) L2(-2.4,-2) L3(-1.6,-2) L7(1.6,-2) L8(2.4,-2) L9(3.2,-2) M1(-3.2,-2.8) M2(-2.4,-2.8) M3(-1.6,-2.8) M7(1.6,-2.8) M8(2.4,-2.8) M9(3.2,-2.8) N1(-3.2,-3.6) N2(-2.4,-3.6) N3(-1.6,-3.6) N7(1.6,-3.6) N8(2.4,-3.6) N9(3.2,-3.6) P1(-3.2,-4.4) P2(-2.4,-4.4) P3(-1.6,-4.4) P7(1.6,-4.4) P8(2.4,-4.4) P9(3.2,-4.4) R1(-3.2,-5.2) R2(-2.4,-5.2) R3(-1.6,-5.2) R7(1.6,-5.2) R8(2.4,-5.2) R9(3.2,-5.2) T1(-3.2,-6) T2(-2.4,-6) T3(-1.6,-6) T7(1.6,-6) T8(2.4,-6) T9(3.2,-6)
R0201
  rect 0.25x0.3 smd: 1(-0.275,0) 2(0.275,0)
R0402
  rect 0.5x0.5 smd: 1(-0.45,0) 2(0.45,0)
R0402#2
  rect 0.55x0.55 smd: 1(-0.45,0) 2(0.45,0)
RP2_0405
  rect 0.5x0.3 smd: 1(-0.625,-0.275) 2(0.625,-0.275) 3(-0.625,0.275) 4(0.625,0.275)
TP_0R70
  round 0.7 smd: 1(0,0)

## Nets
GND: C1000.2 C1001.2 C1002.2 C1003.2 C1004.2 C1005.2 C1006.2 C1007.2 C1008.2 C1009.2 C1010.2 C1011.2 C1012.2 C1013.2 C1014.2 C1015.2 C1016.2 C1017.2 C1018.2 C1019.2 C1020.2 C1100.2 C1101.2 C1102.2 C1103.2 C1104.2 C1200.2 C1201.2 C1202.2 C1203.2 C1204.2 C1205.2 C1206.2 C1207.2 C1208.2 C1209.2 C1210.2 C1211.2 C1212.2 C1213.2 C1214.2 C1300.2 C1301.2 C1400.2 C1401.2 C1402.2 C1403.2 C1404.2 C1405.2 C1406.2 C1407.2 C1408.2 C1409.2 C1410.2 C1411.2 C1412.2 C1413.2 C1414.2 C1500.2 C1501.2 C1502.2 C1503.2 C1504.2 C1505.2 C1506.2 C1507.2 C1508.2 C1509.2 C1510.2 C1511.2 C1600.2 C1601.2 C1602.2 C1603.2 C1700.2 C1701.2 C1702.2 C1703.2 C1712.2 C1713.2 C1714.2 C1715.2 C1716.2 C1717.2 C1718.2 C1719.2 C1720.2 C1800.2 C1900.2 C3100.2 C3101.2 C3102.2 C3103.2 C3104.2 C3105.2 C3106.2 C3107.2 C3108.2 C3109.2 C3110.2 C3111.2 C3112.2 C3113.2 C3114.2 C3115.2 C3116.2 C3117.2 C3118.2 C3119.2 C3120.2 C3121.2 C3122.2 C3123.2 C3124.2 C3125.2 C3126.2 C3127.2 C3128.2 C3129.2 C3130.2 C3131.2 C3132.2 C3133.2 C3134.2 C3135.2 C3136.2 C3137.2 C3138.2 C3139.2 C3140.2 C3141.2 C3142.2 C3143.2 C3144.2 C3145.2 C3146.2 C3147.2 C3148.2 C3150.2 R1100.2 R1400.2 R1708.2 R3100.2 R3101.2 R3102.2 R3103.2 R3106.2 R3110.2 TP1301.1 TP1303.1 TP1502.1 U1000.A1(VSS_1) U1000.A3(VSS_2) U1000.A6(VSS_3) U1000.A10(VSS_4) U1000.A14(VSS_5) U1000.A18(VSS_6) U1000.A28(VSS_7) U1000.AA4(VSS_133) U1000.AA9(VSS_134) U1000.AA12(AVSS_24) U1000.AA14(AVSS_25) U1000.AA15(AVSS_26) U1000.AA17(AVSS_27) U1000.AA23(VSS_135) U1000.AA24(AVSS_28) U1000.AA26(AVSS_29) U1000.AB2(VSS_136) U1000.AB6(VSS_137) U1000.AB11(AVSS_30) U1000.AB12(AVSS_31) U1000.AB14(AVSS_32) U1000.AB15(AVSS_33) U1000.AB17(AVSS_34) U1000.AB24(TVSS) U1000.AC9(AVSS_35) U1000.AC11(AVSS_36) U1000.AC12(AVSS_37) U1000.AC15(AVSS_38) U1000.AC18(AVSS_39) U1000.AC25(AVSS_40) U1000.AC26(AVSS_41) U1000.AD3(VSS_138) U1000.AD26(AVSS_42) U1000.AE6(VSS_139) U1000.AE14(AVSS_43) U1000.AE17(AVSS_44) U1000.AE20(AVSS_45) U1000.AE21(VSS_140) U1000.AE27(AVSS_46) U1000.AE28(AVSS_47) U1000.AF3(VSS_141) U1000.AF9(AVSS_48) U1000.AF11(AVSS_49) U1000.AF12(AVSS_50) U1000.AF14(AVSS_51) U1000.AF15(AVSS_52) U1000.AF17(AVSS_53) U1000.AF18(AVSS_54) U1000.AF20(AVSS_55) U1000.AF21(AVSS_56) U1000.AF26(VSS_142) U1000.AG5(VSS_143) U1000.AG18(AVSS_57) U1000.AH1(VSS_144) U1000.AH8(VSS_145) U1000.AH18(AVSS_58) U1000.AH23(AVSS_59) U1000.AH28(VSS_146) U1000.B5(VSS_8) U1000.B9(VSS_9) U1000.B12(VSS_10) U1000.B16(VSS_11) U1000.B23(VSS_12) U1000.B26(VSS_13) U1000.C3(VSS_14) U1000.C6(VSS_15) U1000.C8(VSS_16) U1000.C9(VSS_17) U1000.C11(VSS_18) U1000.C12(VSS_19) U1000.C14(VSS_20) U1000.C15(VSS_21) U1000.C17(VSS_22) U1000.C18(VSS_23) U1000.C25(VSS_24) U1000.D2(VSS_25) U1000.D3(VSS_26) U1000.D11(VSS_27) U1000.D28(VSS_28) U1000.E3(VSS_29) U1000.E7(VSS_30) U1000.F1(VSS_31) U1000.F3(VSS_32) U1000.F9(VSS_33) U1000.F12(VSS_34) U1000.F14(VSS_35) U1000.F15(VSS_36) U1000.F17(VSS_37) U1000.G5(VSS_38) U1000.G6(VSS_39) U1000.G8(VSS_40) U1000.G9(VSS_41) U1000.G11(VSS_42) U1000.G12(VSS_43) U1000.G14(VSS_44) U1000.G15(VSS_45) U1000.G17(VSS_46) U1000.G18(VSS_47) U1000.G24(VSS_48) U1000.H2(VSS_49) U1000.H3(VSS_50) U1000.H6(VSS_51) U1000.J3(VSS_52) U1000.J5(VSS_53) U1000.J8(DDR_AVSS) U1000.J17(VSS_54) U1000.J18(VSS_55) U1000.J20(VSS_56) U1000.J22(VSS_57) U1000.J26(VSS_58) U1000.J27(AVSS_1) U1000.K1(VSS_59) U1000.K11(VSS_60) U1000.K12(VSS_61) U1000.K13(VSS_62) U1000.K14(VSS_63) U1000.K19(VSS_64) U1000.L3(VSS_65) U1000.L5(VSS_66) U1000.L8(VSS_67) U1000.L11(VSS_68) U1000.L13(VSS_69) U1000.L14(VSS_70) U1000.L19(VSS_71) U1000.L20(VSS_72) U1000.L21(VSS_73) U1000.L24(AVSS_2) U1000.L26(AVSS_3) U1000.M2(VSS_74) U1000.M3(VSS_75) U1000.M6(VSS_76) U1000.M8(VSS_77) U1000.M11(VSS_78) U1000.M13(VSS_79) U1000.M14(VSS_80) U1000.M16(VSS_81) U1000.M18(VSS_82) U1000.M21(AVSS_4) U1000.M26(AVSS_5) U1000.N1(VSS_83) U1000.N11(SYSPLL_AVSS) U1000.N12(VSS_84) U1000.N14(VSS_85) U1000.N15(VSS_86) U1000.N17(VSS_87) U1000.N18(VSS_88) U1000.N28(AVSS_6) U1000.P3(VSS_89) U1000.P6(VSS_90) U1000.P12(VSS_91) U1000.P14(VSS_92) U1000.P15(VSS_93) U1000.P17(VSS_94) U1000.P21(AVSS_7) U1000.P26(AVSS_8) U1000.R3(VSS_95) U1000.R6(VSS_96) U1000.R10(VSS_97) U1000.R11(VSS_98) U1000.R14(VSS_99) U1000.R15(VSS_100) U1000.R17(VSS_101) U1000.R18(VSS_102) U1000.R19(VSS_103) U1000.R23(AVSS_9) U1000.R26(AVSS_10) U1000.T10(VSS_104) U1000.T11(VSS_105) U1000.T14(VSS_106) U1000.T15(VSS_107) U1000.T17(VSS_108) U1000.T18(VSS_109) U1000.T19(VSS_110) U1000.U1(VSS_111) U1000.U6(VSS_112) U1000.U7(VSS_113) U1000.U8(VSS_114) U1000.U10(VSS_115) U1000.U14(VSS_116) U1000.U15(VSS_117) U1000.U16(VSS_118) U1000.U17(VSS_119) U1000.U18(VSS_120) U1000.U23(AVSS_11) U1000.U26(AVSS_12) U1000.V3(VSS_121) U1000.V8(VSS_122) U1000.V9(VSS_123) U1000.V13(VSS_124) U1000.V14(AVSS_13) U1000.V15(AVSS_14) U1000.V16(AVSS_15) U1000.V20(PMUPLL_AVSS) U1000.V22(AVSS_16) U1000.V23(AVSS_17) U1000.V26(AVSS_18) U1000.W10(VSS_125) U1000.W11(VSS_126) U1000.W12(VSS_127) U1000.W13(VSS_128) U1000.W17(AVSS_19) U1000.Y8(VSS_129) U1000.Y9(VSS_130) U1000.Y11(VSS_131) U1000.Y12(VSS_132) U1000.Y18(AVSS_20) U1000.Y23(AVSS_21) U1000.Y24(AVSS_22) U1000.Y26(AVSS_23) U3100.A9(VSS#A9) U3100.B1(VSSQ#B1) U3100.B3(VSS#B3) U3100.B9(VSSQ#B9) U3100.D1(VSSQ#D1) U3100.D8(VSSQ#D8) U3100.E1(VSS#E1) U3100.E2(VSSQ#E2) U3100.E8(VSSQ#E8) U3100.F9(VSSQ#F9) U3100.G1(VSSQ#G1) U3100.G8(VSS#G8) U3100.G9(VSSQ#G9) U3100.J2(VSS#J2) U3100.J8(VSS#J8) U3100.M1(VSS#M1) U3100.M9(VSS#M9) U3100.P1(VSS#P1) U3100.P9(VSS#P9) U3100.T1(VSS#T1) U3100.T9(VSS#T9) U3101.A9(VSS#A9) U3101.B1(VSSQ#B1) U3101.B3(VSS#B3) U3101.B9(VSSQ#B9) U3101.D1(VSSQ#D1) U3101.D8(VSSQ#D8) U3101.E1(VSS#E1) U3101.E2(VSSQ#E2) U3101.E8(VSSQ#E8) U3101.F9(VSSQ#F9) U3101.G1(VSSQ#G1) U3101.G8(VSS#G8) U3101.G9(VSSQ#G9) U3101.J2(VSS#J2) U3101.J8(VSS#J8) U3101.M1(VSS#M1) U3101.M9(VSS#M9) U3101.P1(VSS#P1) U3101.P9(VSS#P9) U3101.T1(VSS#T1) U3101.T9(VSS#T9) U3102.A9(VSS#A9) U3102.B1(VSSQ#B1) U3102.B3(VSS#B3) U3102.B9(VSSQ#B9) U3102.D1(VSSQ#D1) U3102.D8(VSSQ#D8) U3102.E1(VSS#E1) U3102.E2(VSSQ#E2) U3102.E8(VSSQ#E8) U3102.F9(VSSQ#F9) U3102.G1(VSSQ#G1) U3102.G8(VSS#G8) U3102.G9(VSSQ#G9) U3102.J2(VSS#J2) U3102.J8(VSS#J8) U3102.M1(VSS#M1) U3102.M9(VSS#M9) U3102.P1(VSS#P1) U3102.P9(VSS#P9) U3102.T1(VSS#T1) U3102.T9(VSS#T9) U3103.A9(VSS#A9) U3103.B1(VSSQ#B1) U3103.B3(VSS#B3) U3103.B9(VSSQ#B9) U3103.D1(VSSQ#D1) U3103.D8(VSSQ#D8) U3103.E1(VSS#E1) U3103.E2(VSSQ#E2) U3103.E8(VSSQ#E8) U3103.F9(VSSQ#F9) U3103.G1(VSSQ#G1) U3103.G8(VSS#G8) U3103.G9(VSSQ#G9) U3103.J2(VSS#J2) U3103.J8(VSS#J8) U3103.M1(VSS#M1) U3103.M9(VSS#M9) U3103.P1(VSS#P1) U3103.P9(VSS#P9) U3103.T1(VSS#T1) U3103.T9(VSS#T9) Y1200.2(GND#2) Y1200.4(GND#4)
VCC3V3_PMU: C1203.1 C1210.1 R1204.1 R1205.1 R1206.1 R1207.1 U1000.W19(PMUIO2) U1000.Y20(PMUIO1)
VCC_1V8: C1511.1 R1509.2 R1610.2 U1000.H20(OTP_VCC18)
VCC_3V3: C1401.1 C1404.1 C1509.1 C1800.1 R1511.2 R1611.2 R1800.1 R1801.1 R1804.1 R1805.1 U1000.M23(USB3_AVDD_3V3) U1000.P10(USB2_AVDD_3V3) U1000.V10(VCCIO5_1) U1000.V11(VCCIO5_2) U1000.V12(VCCIO7)
VCC_DDR: C1100.1 C1101.1 C1102.1 C1103.1 C1104.1 C3109.1 C3110.1 C3111.1 C3112.1 C3113.1 C3114.1 C3115.1 C3116.1 C3117.1 C3118.1 C3119.1 C3120.1 C3121.1 C3122.1 C3123.1 C3124.1 C3125.1 C3126.1 C3131.1 C3132.1 C3133.1 C3134.1 C3135.1 C3136.1 C3137.1 C3138.1 C3139.1 C3140.1 C3141.1 C3142.1 C3143.1 C3144.1 C3145.1 C3146.1 C3147.1 C3148.1 C3149.1 R3104.1 R3108.1 U1000.H9(DDRPHY_VDDQ_1) U1000.H11(DDRPHY_VDDQ_2) U1000.H12(DDRPHY_VDDQ_3) U1000.H14(DDRPHY_VDDQ_4) U1000.H15(DDRPHY_VDDQ_5) U1000.J9(DDRPHY_VDDQ_6) U1000.J11(DDRPHY_VDDQL_1) U1000.J12(DDRPHY_VDDQL_2) U1000.J14(DDRPHY_VDDQL_3) U1000.K10(DDRPHY_VDDQL_4) U1000.L9(DDRPHY_VDDQ_7) U1000.L10(DDRPHY_VDDQL_5) U1000.M9(DDRPHY_VDDQ_8) U1000.M10(DDRPHY_VDDQL_6) U3100.A1(VDDQ#A1) U3100.A8(VDDQ#A8) U3100.B2(VDD#B2) U3100.C1(VDDQ#C1) U3100.C9(VDDQ#C9) U3100.D2(VDDQ#D2) U3100.D9(VDD#D9) U3100.E9(VDDQ#E9) U3100.F1(VDDQ#F1) U3100.G7(VDD#G7) U3100.H2(VDDQ#H2) U3100.H9(VDDQ#H9) U3100.K2(VDD#K2) U3100.K8(VDD#K8) U3100.N1(VDD#N1) U3100.N9(VDD#N9) U3100.R1(VDD#R1) U3100.R9(VDD#R9) U3101.A1(VDDQ#A1) U3101.A8(VDDQ#A8) U3101.B2(VDD#B2) U3101.C1(VDDQ#C1) U3101.C9(VDDQ#C9) U3101.D2(VDDQ#D2) U3101.D9(VDD#D9) U3101.E9(VDDQ#E9) U3101.F1(VDDQ#F1) U3101.G7(VDD#G7) U3101.H2(VDDQ#H2) U3101.H9(VDDQ#H9) U3101.K2(VDD#K2) U3101.K8(VDD#K8) U3101.N1(VDD#N1) U3101.N9(VDD#N9) U3101.R1(VDD#R1) U3101.R9(VDD#R9) U3102.A1(VDDQ#A1) U3102.A8(VDDQ#A8) U3102.B2(VDD#B2) U3102.C1(VDDQ#C1) U3102.C9(VDDQ#C9) U3102.D2(VDDQ#D2) U3102.D9(VDD#D9) U3102.E9(VDDQ#E9) U3102.F1(VDDQ#F1) U3102.G7(VDD#G7) U3102.H2(VDDQ#H2) U3102.H9(VDDQ#H9) U3102.K2(VDD#K2) U3102.K8(VDD#K8) U3102.N1(VDD#N1) U3102.N9(VDD#N9) U3102.R1(VDD#R1) U3102.R9(VDD#R9) U3103.A1(VDDQ#A1) U3103.A8(VDDQ#A8) U3103.B2(VDD#B2) U3103.C1(VDDQ#C1) U3103.C9(VDDQ#C9) U3103.D2(VDDQ#D2) U3103.D9(VDD#D9) U3103.E9(VDDQ#E9) U3103.F1(VDDQ#F1) U3103.G7(VDD#G7) U3103.H2(VDDQ#H2) U3103.H9(VDDQ#H9) U3103.K2(VDD#K2) U3103.K8(VDD#K8) U3103.N1(VDD#N1) U3103.N9(VDD#N9) U3103.R1(VDD#R1) U3103.R9(VDD#R9)
VCCA1V8_IMAGE: C1713.1 C1715.1 C1717.1 C1720.1 U1000.M22(EDP_TX_AVDD_1V8) U1000.W18(HDMI_TX_AVDD_1V8)
VCCA1V8_PMU: C1206.1 C1207.1 U1000.Y21(PMUPLL_AVDD_1V8)
VCCA_1V8: C1211.1 C1212.1 C1407.1 C1410.1 C1411.1 C1414.1 C1510.1 R1512.1 U1000.H22(SARADC_AVDD_1V8) U1000.N10(SYSPLL_AVDD_1V8) U1000.R22(MULTI_PHY_AVDD_1V8) U1000.U22(PCIE30_AVDD_1V8)
VCCIO4: C1500.1 R1509.1 R1510.1 R1511.1 U1000.J21(VCCIO4)
VCCIO6: C1602.1 C1603.1 R1606.1 R1607.1 R1610.1 R1611.1 U1000.R9(VCCIO6_1) U1000.U9(VCCIO6_2)
VCCIO_ACODEC: C1900.1 R1900.1 R1901.1 U1000.H17(VCCIO1)
VCCIO_FLASH: C1300.1 U1000.H18(VCCIO2)
VCCIO_SD: C1301.1 U1000.L22(VCCIO3)
VCCIO_WL: R1510.2
VDD_CPU: C1000.1 C1001.1 C1002.1 C1003.1 C1004.1 U1000.J15(VDD_CPU_1) U1000.K15(VDD_CPU_2) U1000.K16(VDD_CPU_3) U1000.K17(VDD_CPU_4) U1000.K18(VDD_CPU_5) U1000.L15(VDD_CPU_6) U1000.L16(VDD_CPU_7) U1000.L17(VDD_CPU_8) U1000.L18(VDD_CPU_9) U1000.M17(VDD_CPU_10)
VDD_CPU_COM: U1000.M15(VDD_CPU_COM)
VDD_GPU: C1012.1 C1013.1 C1014.1 C1015.1 C1016.1 U1000.R13(VDD_GPU_1) U1000.T13(VDD_GPU_2) U1000.U11(VDD_GPU_3) U1000.U12(VDD_GPU_4) U1000.U13(VDD_GPU_5)
VDD_LOGIC: C1005.1 C1006.1 C1007.1 C1008.1 C1009.1 C1010.1 C1011.1 U1000.L12(VDD_LOGIC_1) U1000.M12(VDD_LOGIC_2) U1000.N13(VDD_LOGIC_3) U1000.N16(VDD_LOGIC_4) U1000.P13(VDD_LOGIC_5) U1000.P16(VDD_LOGIC_6) U1000.R12(VDD_LOGIC_7) U1000.R16(VDD_LOGIC_8) U1000.T12(VDD_LOGIC_9) U1000.T16(VDD_LOGIC_10)
VDD_NPU: C1017.1 C1018.1 C1019.1 C1020.1 U1000.M19(VDD_NPU_1) U1000.N19(VDD_NPU_2) U1000.P18(VDD_NPU_3) U1000.P19(VDD_NPU_4) U1000.P20(VDD_NPU_5)
VDDA0V9_IMAGE: C1714.1 C1716.1 C1718.1 C1719.1 U1000.M20(EDP_TX_AVDD_0V9) U1000.V17(HDMI_TX_AVDD_0V9_1) U1000.V18(HDMI_TX_AVDD_0V9_2)
VDDA0V9_PMU: C1204.1 C1205.1 C1213.1 C1214.1 U1000.V19(PMU_VDD_LOGIC_0V9) U1000.V21(PMUPLL_AVDD_0V9)
VDDA_0V9: C1208.1 C1209.1 C1408.1 C1409.1 C1412.1 C1413.1 U1000.P11(SYSPLL_AVDD_0V9) U1000.R20(MULTI_PHY_AVDD_0V9_1) U1000.R21(MULTI_PHY_AVDD_0V9_2) U1000.U20(PCIE30_AVDD_0V9_2) U1000.U21(PCIE30_AVDD_0V9_1)
4G_DISABLE_GPIO4_C2: U1000.AF8(GPIO4_C2_D)
4G_PWREN_H_GPIO0_C6: U1000.AD20(GPIO0_C6_D)
BT_REG_ON_H_GPIO2_B7: U1000.H25(GPIO2_B7_D)
BT_WAKE_HOST_H_GPIO2_C0: U1000.F24(GPIO2_C0_D)
CAN0_RX_M1: R1304.1 U1000.H28(GPIO2_A2_D)
CAN0_TX_M1: U1000.H27(GPIO2_A1_U)
CIF_CLKOUT: R1609.2
CIF_CLKOUT_SOC: R1609.1 U1000.U3(GPIO4_C0_D)
CLK32K_OUT1_WIFI: R1508.2
DDR3_A0: U1000.E4(AC15) U3100.N3(A0) U3101.N3(A0) U3102.N3(A0) U3103.N3(A0)
DDR3_A1: U1000.E11(AC18) U3100.P7(A1) U3101.P7(A1) U3102.P7(A1) U3103.P7(A1)
DDR3_A2: U1000.F5(AC1) U3100.P3(A2) U3101.P3(A2) U3102.P3(A2) U3103.P3(A2)
DDR3_A3: U1000.F4(AC3) U3100.N2(A3) U3101.N2(A3) U3102.N2(A3) U3103.N2(A3)
DDR3_A4: U1000.B1(AC2) U3100.P8(A4) U3101.P8(A4) U3102.P8(A4) U3103.P8(A4)
DDR3_A5: U1000.A5(AC9) U3100.P2(A5) U3101.P2(A5) U3102.P2(A5) U3103.P2(A5)
DDR3_A6: U1000.C1(AC8) U3100.R8(A6) U3101.R8(A6) U3102.R8(A6) U3103.R8(A6)
DDR3_A7: U1000.C2(AC11) U3100.R2(A7) U3101.R2(A7) U3102.R2(A7) U3103.R2(A7)
DDR3_A8: U1000.A8(AC7) U3100.T8(A8) U3101.T8(A8) U3102.T8(A8) U3103.T8(A8)
DDR3_A9: U1000.B6(AC0) U3100.R3(A9) U3101.R3(A9) U3102.R3(A9) U3103.R3(A9)
DDR3_A10: U1000.D6(AC10) U3100.L7(AP/A10) U3101.L7(AP/A10) U3102.L7(AP/A10) U3103.L7(AP/A10)
DDR3_A11: U1000.B7(AC5) U3100.R7(A11) U3101.R7(A11) U3102.R7(A11) U3103.R7(A11)
DDR3_A12: U1000.E9(AC19) U3100.N7(B\C\/A12) U3101.N7(B\C\/A12) U3102.N7(B\C\/A12) U3103.N7(B\C\/A12)
DDR3_A13: U1000.A7(AC6) U3100.T3(A13) U3101.T3(A13) U3102.T3(A13) U3103.T3(A13)
DDR3_A14: U1000.B8(AC13) U3100.T7(A14) U3101.T7(A14) U3102.T7(A14) U3103.T7(A14)
DDR3_A15: U1000.C5(AC14) U3100.M7(A15) U3101.M7(A15) U3102.M7(A15) U3103.M7(A15)
DDR3_BA0: U1000.F7(AC21) U3100.M2(BA0) U3101.M2(BA0) U3102.M2(BA0) U3103.M2(BA0)
DDR3_BA1: U1000.D9(AC4) U3100.N8(BA1) U3101.N8(BA1) U3102.N8(BA1) U3103.N8(BA1)
DDR3_BA2: U1000.C4(AC12) U3100.M3(BA2) U3101.M3(BA2) U3102.M3(BA2) U3103.M3(BA2)
DDR3_CASN: U1000.E6(AC17) U3100.K3(C\A\S\) U3101.K3(C\A\S\) U3102.K3(C\A\S\) U3103.K3(C\A\S\)
DDR3_CKE: U1000.B3(AC22) U3100.K9(CKE0) U3101.K9(CKE0) U3102.K9(CKE0) U3103.K9(CKE0)
DDR3_CLKN: R3107.1 U1000.A4(AC24) U3100.K7(C\K\) U3101.K7(C\K\) U3102.K7(C\K\) U3103.K7(C\K\)
DDR3_CLKP: R3105.1 U1000.B4(AC23) U3100.J7(CK) U3101.J7(CK) U3102.J7(CK) U3103.J7(CK)
DDR3_CS0N: U1000.D8(AC28) U3100.L2(C\S\0\) U3101.L2(C\S\0\)
DDR3_CS1N: U1000.B2(AC26) U3102.L2(C\S\0\) U3103.L2(C\S\0\)
DDR3_DM0: U1000.H5(DDR_DM0_A) U3100.E7(DML) U3102.E7(DML)
DDR3_DM1: U1000.J4(DDR_DM1_A) U3100.D3(DMU) U3102.D3(DMU)
DDR3_DM2: U1000.D14(DDR_DM0_B) U3101.D3(DMU) U3103.D3(DMU)
DDR3_DM3: U1000.E17(DDR_DM1_B) U3101.E7(DML) U3103.E7(DML)
DDR3_DQ0: U1000.F2(DDR_DQ0_A) U3100.E3(DQL0) U3102.F7(DQL1)
DDR3_DQ1: U1000.E1(DDR_DQ1_A) U3100.F2(DQL2) U3102.F8(DQL3)
DDR3_DQ2: U1000.E2(DDR_DQ2_A) U3100.H3(DQL4) U3102.H7(DQL7)
DDR3_DQ3: U1000.D1(DDR_DQ3_A) U3100.G2(DQL6) U3102.H8(DQL5)
DDR3_DQ4: U1000.J1(DDR_DQ4_A) U3100.H8(DQL5) U3102.G2(DQL6)
DDR3_DQ5: U1000.J2(DDR_DQ5_A) U3100.H7(DQL7) U3102.H3(DQL4)
DDR3_DQ6: U1000.H1(DDR_DQ6_A) U3100.F7(DQL1) U3102.E3(DQL0)
DDR3_DQ7: U1000.H4(DDR_DQ7_A) U3100.F8(DQL3) U3102.F2(DQL2)
DDR3_DQ8: U1000.M1(DDR_DQ8_A) U3100.A7(DQU4) U3102.A3(DQU7)
DDR3_DQ9: U1000.N2(DDR_DQ9_A) U3100.B8(DQU6) U3102.A2(DQU5)
DDR3_DQ10: U1000.L7(DDR_DQ10_A) U3100.D7(DQU0) U3102.C3(DQU1)
DDR3_DQ11: U1000.L6(DDR_DQ11_A) U3100.C8(DQU2) U3102.C2(DQU3)
DDR3_DQ12: U1000.K2(DDR_DQ12_A) U3100.C3(DQU1) U3102.D7(DQU0)
DDR3_DQ13: U1000.J6(DDR_DQ13_A) U3100.A2(DQU5) U3102.B8(DQU6)
DDR3_DQ14: U1000.J7(DDR_DQ14_A) U3100.C2(DQU3) U3102.C8(DQU2)
DDR3_DQ15: U1000.L4(DDR_DQ15_A) U3100.A3(DQU7) U3102.A7(DQU4)
DDR3_DQ16: U1000.B10(DDR_DQ0_B) U3101.C8(DQU2) U3103.C2(DQU3)
DDR3_DQ17: U1000.A9(DDR_DQ1_B) U3101.D7(DQU0) U3103.C3(DQU1)
DDR3_DQ18: U1000.D12(DDR_DQ2_B) U3101.A7(DQU4) U3103.A3(DQU7)
DDR3_DQ19: U1000.E12(DDR_DQ3_B) U3101.B8(DQU6) U3103.A2(DQU5)
DDR3_DQ20: U1000.A12(DDR_DQ4_B) U3101.A3(DQU7) U3103.A7(DQU4)
DDR3_DQ21: U1000.D15(DDR_DQ5_B) U3101.C2(DQU3) U3103.C8(DQU2)
DDR3_DQ22: U1000.E15(DDR_DQ6_B) U3101.A2(DQU5) U3103.B8(DQU6)
DDR3_DQ23: U1000.E14(DDR_DQ7_B) U3101.C3(DQU1) U3103.D7(DQU0)
DDR3_DQ24: U1000.A16(DDR_DQ8_B) U3101.E3(DQL0) U3103.F7(DQL1)
DDR3_DQ25: U1000.B17(DDR_DQ9_B) U3101.F2(DQL2) U3103.F8(DQL3)
DDR3_DQ26: U1000.A17(DDR_DQ10_B) U3101.H3(DQL4) U3103.H7(DQL7)
DDR3_DQ27: U1000.B18(DDR_DQ11_B) U3101.G2(DQL6) U3103.H8(DQL5)
DDR3_DQ28: U1000.B13(DDR_DQ12_B) U3101.H7(DQL7) U3103.H3(DQL4)
DDR3_DQ29: U1000.A13(DDR_DQ13_B) U3101.H8(DQL5) U3103.G2(DQL6)
DDR3_DQ30: U1000.D17(DDR_DQ14_B) U3101.F8(DQL3) U3103.F2(DQL2)
DDR3_DQ31: U1000.B14(DDR_DQ15_B) U3101.F7(DQL1) U3103.E3(DQL0)
DDR3_DQS0N: U1000.G2(DDR_DQS0N_A) U3100.G3(D\Q\S\L\) U3102.G3(D\Q\S\L\)
DDR3_DQS0P: U1000.G1(DDR_DQS0P_A) U3100.F3(DQSL) U3102.F3(DQSL)
DDR3_DQS1N: U1000.L1(DDR_DQS1N_A) U3100.B7(D\Q\S\U\) U3102.B7(D\Q\S\U\)
DDR3_DQS1P: U1000.L2(DDR_DQS1P_A) U3100.C7(DQSU) U3102.C7(DQSU)
DDR3_DQS2N: U1000.B11(DDR_DQS0N_B) U3101.B7(D\Q\S\U\) U3103.B7(D\Q\S\U\)
DDR3_DQS2P: U1000.A11(DDR_DQS0P_B) U3101.C7(DQSU) U3103.C7(DQSU)
DDR3_DQS3N: U1000.A15(DDR_DQS1N_B) U3101.G3(D\Q\S\L\) U3103.G3(D\Q\S\L\)
DDR3_DQS3P: U1000.B15(DDR_DQS1P_B) U3101.F3(DQSL) U3103.F3(DQSL)
DDR3_ODT0: U1000.E8(AC27) U3100.K1(ODT0) U3101.K1(ODT0)
DDR3_ODT1: U1000.A2(AC25) U3102.K1(ODT0) U3103.K1(ODT0)
DDR3_RASN: U1000.D5(AC16) U3100.J3(R\A\S\) U3101.J3(R\A\S\) U3102.J3(R\A\S\) U3103.J3(R\A\S\)
DDR3_RESETN: C3100.1 C3101.1 C3102.1 C3103.1 U1000.F11(AC29) U3100.T2(R\E\S\E\T\) U3101.T2(R\E\S\E\T\) U3102.T2(R\E\S\E\T\) U3103.T2(R\E\S\E\T\)
DDR3_WEN: U1000.F8(AC20) U3100.L3(W\E\) U3101.L3(W\E\) U3102.L3(W\E\) U3103.L3(W\E\)
DDR_RZQ: R1100.1 U1000.H7(DDR_RZQ)
DDRPHY_VREFOUT: C3149.2 C3150.1 R3109.1 U1000.P8(DDR_VREFOUT)
DVP_PWREN0_H_GPIO0_B0: U1000.AD23(GPIO0_B0_U)
EDP_TX_AUXN: U1000.M25(EDP_TX_AUXN)
EDP_TX_AUXP: U1000.L25(EDP_TX_AUXP)
EDP_TX_D0N: C1705.2
EDP_TX_D0P: C1704.2
EDP_TX_D1N: C1709.2
EDP_TX_D1P: C1706.2
EDP_TX_D2N: C1708.2
EDP_TX_D2P: C1707.2
EDP_TX_D3N: C1711.2
EDP_TX_D3P: C1710.2
EDP_TXD0N: C1705.1 U1000.K27(EDP_TX_D0N)
EDP_TXD0P: C1704.1 U1000.J28(EDP_TX_D0P)
EDP_TXD1N: C1709.1 U1000.L27(EDP_TX_D1N)
EDP_TXD1P: C1706.1 U1000.K28(EDP_TX_D1P)
EDP_TXD2N: C1708.1 U1000.M27(EDP_TX_D2N)
EDP_TXD2P: C1707.1 U1000.L28(EDP_TX_D2P)
EDP_TXD3N: C1711.1 U1000.N27(EDP_TX_D3N)
EDP_TXD3P: C1710.1 U1000.M28(EDP_TX_D3P)
EMMC_CLKOUT/FLASH_DQS: R1300.2
EMMC_CLKOUT/FLASH_DQS_SOC: R1300.1 U1000.A23(GPIO1_C5_D)
EMMC_CMD/FLASH_WRN: U1000.B22(GPIO1_C4_U)
EMMC_D0/FLASH_D0: TP1300.1 U1000.A24(GPIO1_B4_U)
EMMC_D1/FLASH_D1: U1000.C21(GPIO1_B5_U)
EMMC_D2/FLASH_D2: U1000.B24(GPIO1_B6_U)
EMMC_D3/FLASH_D3: U1000.D21(GPIO1_B7_U)
EMMC_D4/FLASH_D4: U1000.A25(GPIO1_C0_U)
EMMC_D5/FLASH_D5: U1000.E21(GPIO1_C1_U)
EMMC_D6/FLASH_D6: U1000.E22(GPIO1_C2_U)
EMMC_D7/FLASH_D7: U1000.B25(GPIO1_C3_U)
EMMC_DATA_STROBE/FLASH_CLE: U1000.A26(GPIO1_C6_D)
EMMC_RSTN/FSPI_D2/FLASH_WPN: U1000.F20(GPIO1_C7_D)
ETH0_REFCLKO_25M: R1507.2
ETH1_REFCLKO_25M_M1: R1608.2
ETH1_REFCLKO_25M_M1_SOC: R1608.1 U1000.V1(GPIO4_B3_D)
FLASH_VOL_SEL: U1000.AG25(GPIO0_A7_U)
FSPI_CLK/FLASH_ALE: R1301.2 TP1302.1
FSPI_CLK/FLASH_ALE_SOC: R1301.1 U1000.A22(GPIO1_D0_D)
FSPI_CS0N/FLASH_CS0N: U1000.C23(GPIO1_D3_U)
FSPI_D0/FLASH_RDY: U1000.C24(GPIO1_D1_U)
FSPI_D1/FLASH_RDN: U1000.D23(GPIO1_D2_U)
FSPI_D3/FLASH_CS1N: U1000.A27(GPIO1_D4_U)
GMAC0_INT/PMEB_GPIO3_C0: R1800.2 U1000.AD2(GPIO3_C0_D)
GMAC0_MCLKINOUT: U1000.F25(GPIO2_C2_D)
GMAC0_MDC: U1000.H24(GPIO2_C3_D)
GMAC0_MDIO: U1000.H23(GPIO2_C4_D)
GMAC0_RSTN_GPIO3_B7: U1000.AD4(GPIO3_B7_D)
GMAC0_RXCLK: U1000.B28(GPIO2_A5_U)
GMAC0_RXD0: U1000.F27(GPIO2_B6_U)
GMAC0_RXD2: U1000.E27(GPIO2_A3_U)
GMAC0_RXD3: U1000.E28(GPIO2_A4_U)
GMAC0_TXCLK: R1503.2
GMAC0_TXD0: R1504.2
GMAC0_TXD1: R1505.2
GMAC0_TXD2: R1500.2
GMAC0_TXD3: R1501.2
GMAC0_TXEN: R1506.2
GMAC1_INT/PMEB_GPIO3_A7: R1801.2 U1000.AH2(GPIO3_A7_D)
GMAC1_MCLKINOUT_M1: U1000.U2(GPIO4_C1_D)
GMAC1_MDC_M1: U1000.U5(GPIO4_B6_D)
GMAC1_MDIO_M1: U1000.U4(GPIO4_B7_D)
GMAC1_RSTN_GPIO3_B0: U1000.AG2(GPIO3_B0_D)
GMAC1_RXCLK_M1: U1000.Y3(GPIO4_A3_D)
GMAC1_RXD0_M1: U1000.W1(GPIO4_A7_D)
GMAC1_RXD1_M1: U1000.V7(GPIO4_B0_D)
GMAC1_RXD2_M1: U1000.AA2(GPIO4_A1_D)
GMAC1_RXD3_M1: U1000.Y4(GPIO4_A2_D)
GMAC1_RXDV_CRS_M1: U1000.V2(GPIO4_B1_D)
GMAC1_RXER_M1/GPIO4_B2: TP1600.1 U1000.V4(GPIO4_B2_D)
GMAC1_TXCLK_M1: R1602.2
GMAC1_TXCLK_M1_SOC: R1602.1 U1000.AA3(GPIO4_A0_D)
GMAC1_TXD0_M1: R1603.2
GMAC1_TXD0_M1_SOC: R1603.1 U1000.Y2(GPIO4_A4_D)
GMAC1_TXD1_M1: R1604.2
GMAC1_TXD1_M1_SOC: R1604.1 U1000.Y1(GPIO4_A5_D)
GMAC1_TXD2_M1: R1600.2
GMAC1_TXD2_M1_SOC: R1600.1 U1000.Y6(GPIO3_D6_D)
GMAC1_TXD3_M1: R1601.2
GMAC1_TXD3_M1_SOC: R1601.1 U1000.Y5(GPIO3_D7_D)
GMAC1_TXEN_M1: R1605.2
GMAC1_TXEN_M1_SOC: R1605.1 U1000.W2(GPIO4_A6_D)
GPIO2_B0: R1502.1 R1503.1 U1000.D27(GPIO2_B0_D)
GPIO2_C6: R1508.1 U1000.E26(GPIO2_C6_D)
HDMI_TX0N: R1705.1 U1000.AH20(HDMI_TX_D0N)
HDMI_TX0N_PORT: R1705.2
HDMI_TX0P: R1704.1 U1000.AG20(HDMI_TX_D0P)
HDMI_TX0P_PORT: R1704.2
HDMI_TX1N: R1701.1 U1000.AH21(HDMI_TX_D1N)
HDMI_TX1N_PORT: R1701.2
HDMI_TX1P: R1700.1 U1000.AG21(HDMI_TX_D1P)
HDMI_TX1P_PORT: R1700.2
HDMI_TX2N: R1703.1 U1000.AH22(HDMI_TX_D2N)
HDMI_TX2N_PORT: R1703.2
HDMI_TX2P: R1702.1 U1000.AG22(HDMI_TX_D2P)
HDMI_TX2P_PORT: R1702.2
HDMI_TX_HPDIN: C1712.1 U1000.AB18(HDMI_TX_HPDIN)
HDMI_TX_REXT: R1708.1 U1000.AA18(HDMI_TX_REXT)
HDMI_TXCLKN: L1700.4 R1707.1 U1000.AG19(HDMI_TX_CLKN)
HDMI_TXCLKN_PORT: L1700.3 R1707.2
HDMI_TXCLKP: L1700.2 R1706.1 U1000.AH19(HDMI_TX_CLKP)
HDMI_TXCLKP_PORT: L1700.1 R1706.2
HDMIRX_DET_L_GPIO3_D0: U1000.AB5(GPIO3_D0_D)
HDMIRX_INT_L_GPIO4_C3: U1000.AA11(GPIO4_C3_D)
HDMIRX_PWREN_H_GPIO0_D6: U1000.AC24(GPIO0_D6_D)
HDMIRX_RST_L_GPIO4_D2: U1000.AB9(GPIO4_D2_D)
HDMITX_CEC_M0: U1000.AH6(GPIO4_D1_U)
HDMITX_SCL: U1000.AG8(GPIO4_C7_U)
HDMITX_SDA: U1000.AG7(GPIO4_D0_U)
HOST_WAKE_BT_H_GPIO2_C1: R1507.1 U1000.G23(GPIO2_C1_D)
HP_DET_L_GPIO3_C2: U1000.AA7(GPIO3_C2_D)
I2C0_SCL_PMIC: R1204.2 U1000.AF24(GPIO0_B1_U)
I2C0_SDA_PMIC: R1205.2 U1000.AB21(GPIO0_B2_U)
I2C1_SCL_TP: R1206.2 U1000.AG24(GPIO0_B3_U)
I2C1_SDA_TP: R1207.2 U1000.AB20(GPIO0_B4_U)
I2C2_SCL_M1: R1607.2 U1000.V5(GPIO4_B5_D)
I2C2_SDA_M1: R1606.2 U1000.V6(GPIO4_B4_D)
I2C3_SCL_M0: R1901.2 U1000.E18(GPIO1_A1_U)
I2C3_SDA_M0: R1900.2 U1000.D18(GPIO1_A0_U)
I2C5_SCL_M0: R1804.2 U1000.AF1(GPIO3_B3_D)
I2C5_SDA_M0: R1805.2 U1000.AE1(GPIO3_B4_D)
I2S1_LRCK_TX_M0_RK809: R1905.2
I2S1_LRCK_TX_M0_SOC: R1905.1 U1000.A20(GPIO1_A5_D)
I2S1_MCLK_M0_RK809: R1902.2
I2S1_MCLK_M0_SOC: R1902.1 U1000.A19(GPIO1_A2_D)
I2S1_SCLK_TX_M0_RK809: R1903.2
I2S1_SCLK_TX_M0_SOC: R1903.1 U1000.B19(GPIO1_A3_D)
I2S1_SDI0_M0/PDM_SDI0_M0_RK809: U1000.B21(GPIO1_B3_D)
I2S1_SDO0_M0_RK809: U1000.B20(GPIO1_A7_D)
I2S3_LRCK_M0: R1803.2
I2S3_LRCK_M0_SOC: R1803.1 U1000.AF4(GPIO3_A4_D)
I2S3_MCLK_M0: TP1800.1 U1000.AE5(GPIO3_A2_D)
I2S3_SCLK_M0: R1802.2
I2S3_SCLK_M0_SOC: R1802.1 U1000.AG4(GPIO3_A3_D)
I2S3_SDI_M0: U1000.AG3(GPIO3_A6_D)
I2S3_SDO_M0: TP1801.1 U1000.AH3(GPIO3_A5_D)
LCD0_BL_PWM4: U1000.AE23(GPIO0_C3_D)
LCD0_PWREN_H_GPIO0_C7: U1000.AH25(GPIO0_C7_D)
LCD1_BL_PWM5: U1000.AD21(GPIO0_C4_D)
LCD1_PWREN_H_GPIO0_C5: U1000.AC21(GPIO0_C5_D)
LCD_EN_H_GPIO3_C6: U1000.AC5(GPIO3_C6_D)
LCD_RST_L_GPIO3_C7: U1000.AA6(GPIO3_C7_D)
MIPI_AVDD_0V9: C1601.1 C1701.1 C1703.1 U1000.W14(MIPI_CSI_RX_AVDD_0V9) U1000.W15(MIPI_DSI_TX1_AVDD_0V9) U1000.W16(MIPI_DSI_TX0/LVDS_TX0_AVDD_0V9)
MIPI_AVDD_1V8: C1600.1 C1700.1 C1702.1 U1000.Y14(MIPI_CSI_RX_AVDD_1V8) U1000.Y15(MIPI_DSI_TX1_AVDD_1V8) U1000.Y17(MIPI_DSI_TX0/LVDS_TX0_AVDD_1V8)
MIPI_CAM0_PDN_L_GPIO3_D5: U1000.AA5(GPIO3_D5_D)
MIPI_CAM0_RST_L_GPIO3_D4: U1000.AA1(GPIO3_D4_D)
MIPI_CAM1_PDN_L_GPIO3_D3: U1000.AC1(GPIO3_D3_D)
MIPI_CAM1_RST_L_GPIO3_D2: U1000.Y7(GPIO3_D2_D)
MIPI_CSI_RX_CLK0N: U1000.AH10(MIPI_CSI_RX_CLK0N)
MIPI_CSI_RX_CLK0P: U1000.AG10(MIPI_CSI_RX_CLK0P)
MIPI_CSI_RX_CLK1N: U1000.AH9(MIPI_CSI_RX_CLK1N)
MIPI_CSI_RX_CLK1P: U1000.AG9(MIPI_CSI_RX_CLK1P)
MIPI_CSI_RX_D0N: U1000.AH12(MIPI_CSI_RX_D0N)
MIPI_CSI_RX_D0P: U1000.AG12(MIPI_CSI_RX_D0P)
MIPI_CSI_RX_D1N: U1000.AH11(MIPI_CSI_RX_D1N)
MIPI_CSI_RX_D1P: U1000.AG11(MIPI_CSI_RX_D1P)
MIPI_CSI_RX_D2N: U1000.AD11(MIPI_CSI_RX_D2N)
MIPI_CSI_RX_D2P: U1000.AE11(MIPI_CSI_RX_D2P)
MIPI_CSI_RX_D3N: U1000.AE9(MIPI_CSI_RX_D3N)
MIPI_CSI_RX_D3P: U1000.AD9(MIPI_CSI_RX_D3P)
MIPI_DSI_TX0_CLKN/LVDS_TX0_CLKN: U1000.AG15(MIPI_DSI_TX0_CLKN/LVDS_TX0_CLKN)
MIPI_DSI_TX0_CLKP/LVDS_TX0_CLKP: U1000.AH15(MIPI_DSI_TX0_CLKP/LVDS_TX0_CLKP)
MIPI_DSI_TX0_D0N/LVDS_TX0_D0N: U1000.AG17(MIPI_DSI_TX0_D0N/LVDS_TX0_D0N)
MIPI_DSI_TX0_D0P/LVDS_TX0_D0P: U1000.AH17(MIPI_DSI_TX0_D0P/LVDS_TX0_D0P)
MIPI_DSI_TX0_D1N/LVDS_TX0_D1N: U1000.AG16(MIPI_DSI_TX0_D1N/LVDS_TX0_D1N)
MIPI_DSI_TX0_D1P/LVDS_TX0_D1P: U1000.AH16(MIPI_DSI_TX0_D1P/LVDS_TX0_D1P)
MIPI_DSI_TX0_D2N/LVDS_TX0_D2N: U1000.AG14(MIPI_DSI_TX0_D2N/LVDS_TX0_D2N)
MIPI_DSI_TX0_D2P/LVDS_TX0_D2P: U1000.AH14(MIPI_DSI_TX0_D2P/LVDS_TX0_D2P)
MIPI_DSI_TX0_D3N/LVDS_TX0_D3N: U1000.AG13(MIPI_DSI_TX0_D3N/LVDS_TX0_D3N)
